# Altium PCB FMC_P_CAM.PcbDoc
Units mm, origin at the board's own origin, x right, y up, seen from the top; angles counter-clockwise.
Board outline 152.4 x 101.6 mm, 6 copper layers (Top Layer, Internal Plane 1, Mid-Layer 1, Mid-Layer 2, Internal Plane 2, Bottom Layer); 29 components, 109 nets, 390 pads, 133 vias.
Unrouted connection lines stored in the file: 5.
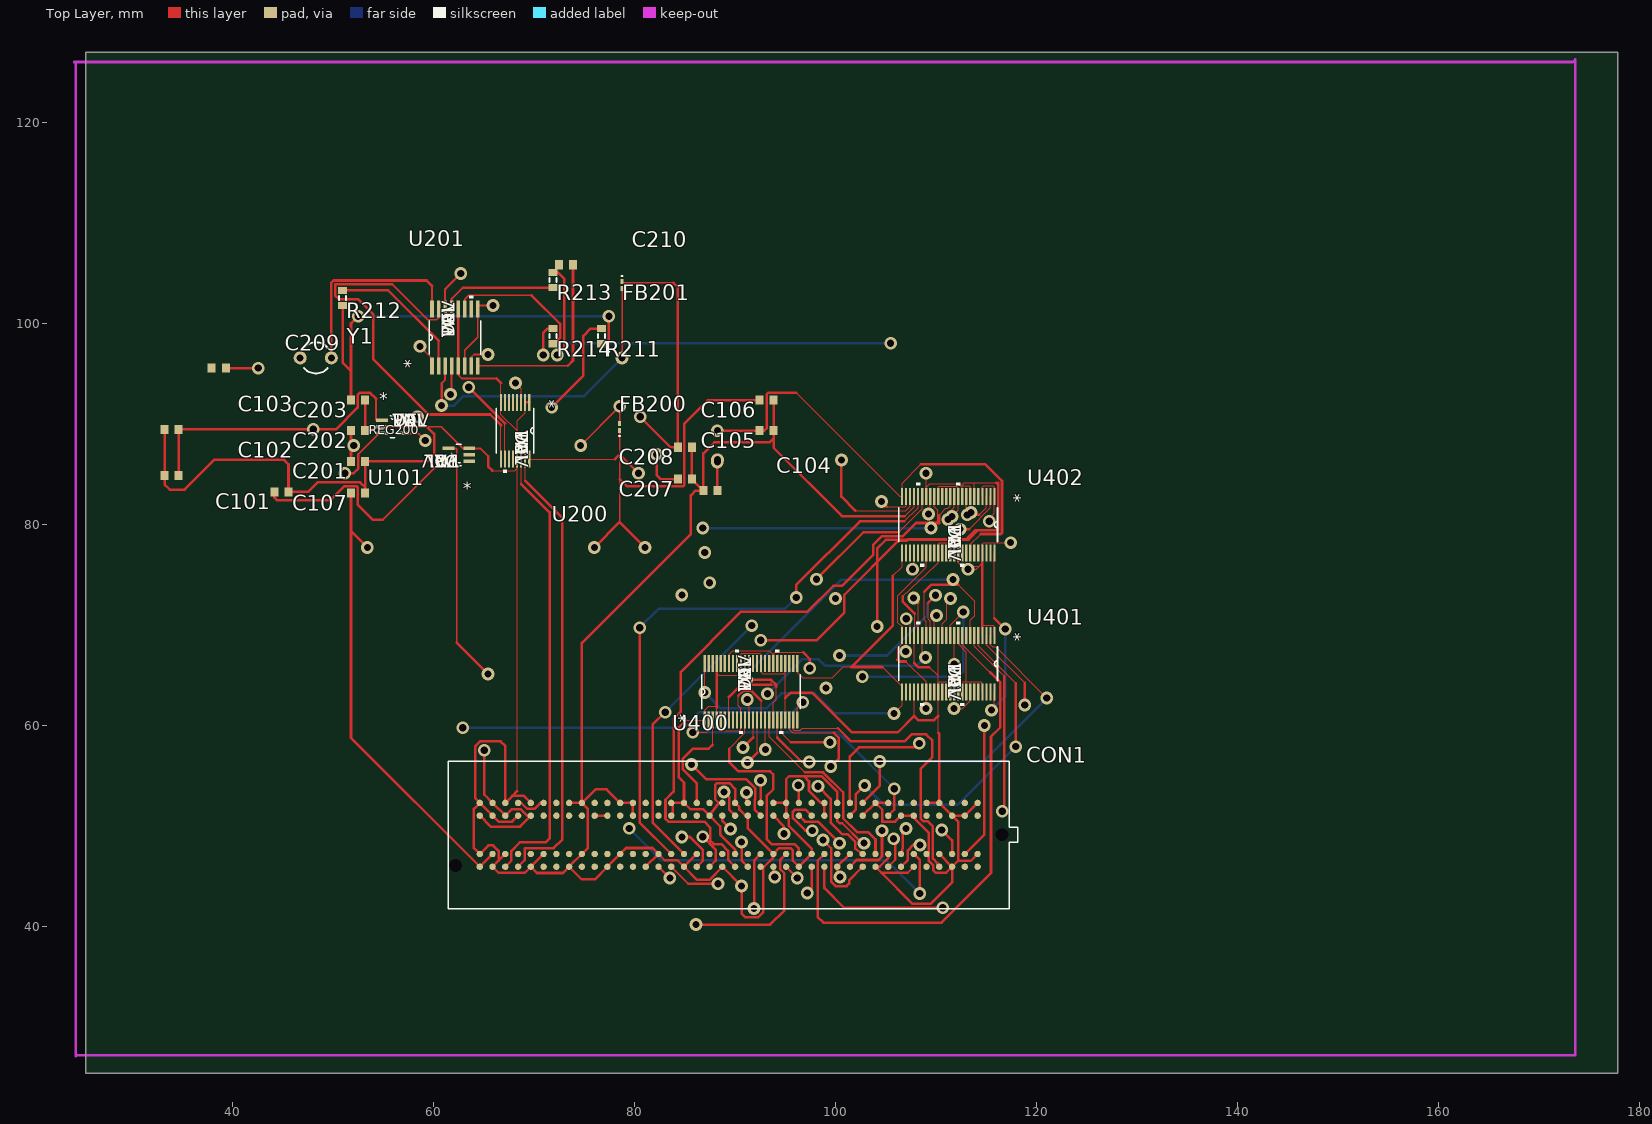
[diagram p0: Top Layer view]
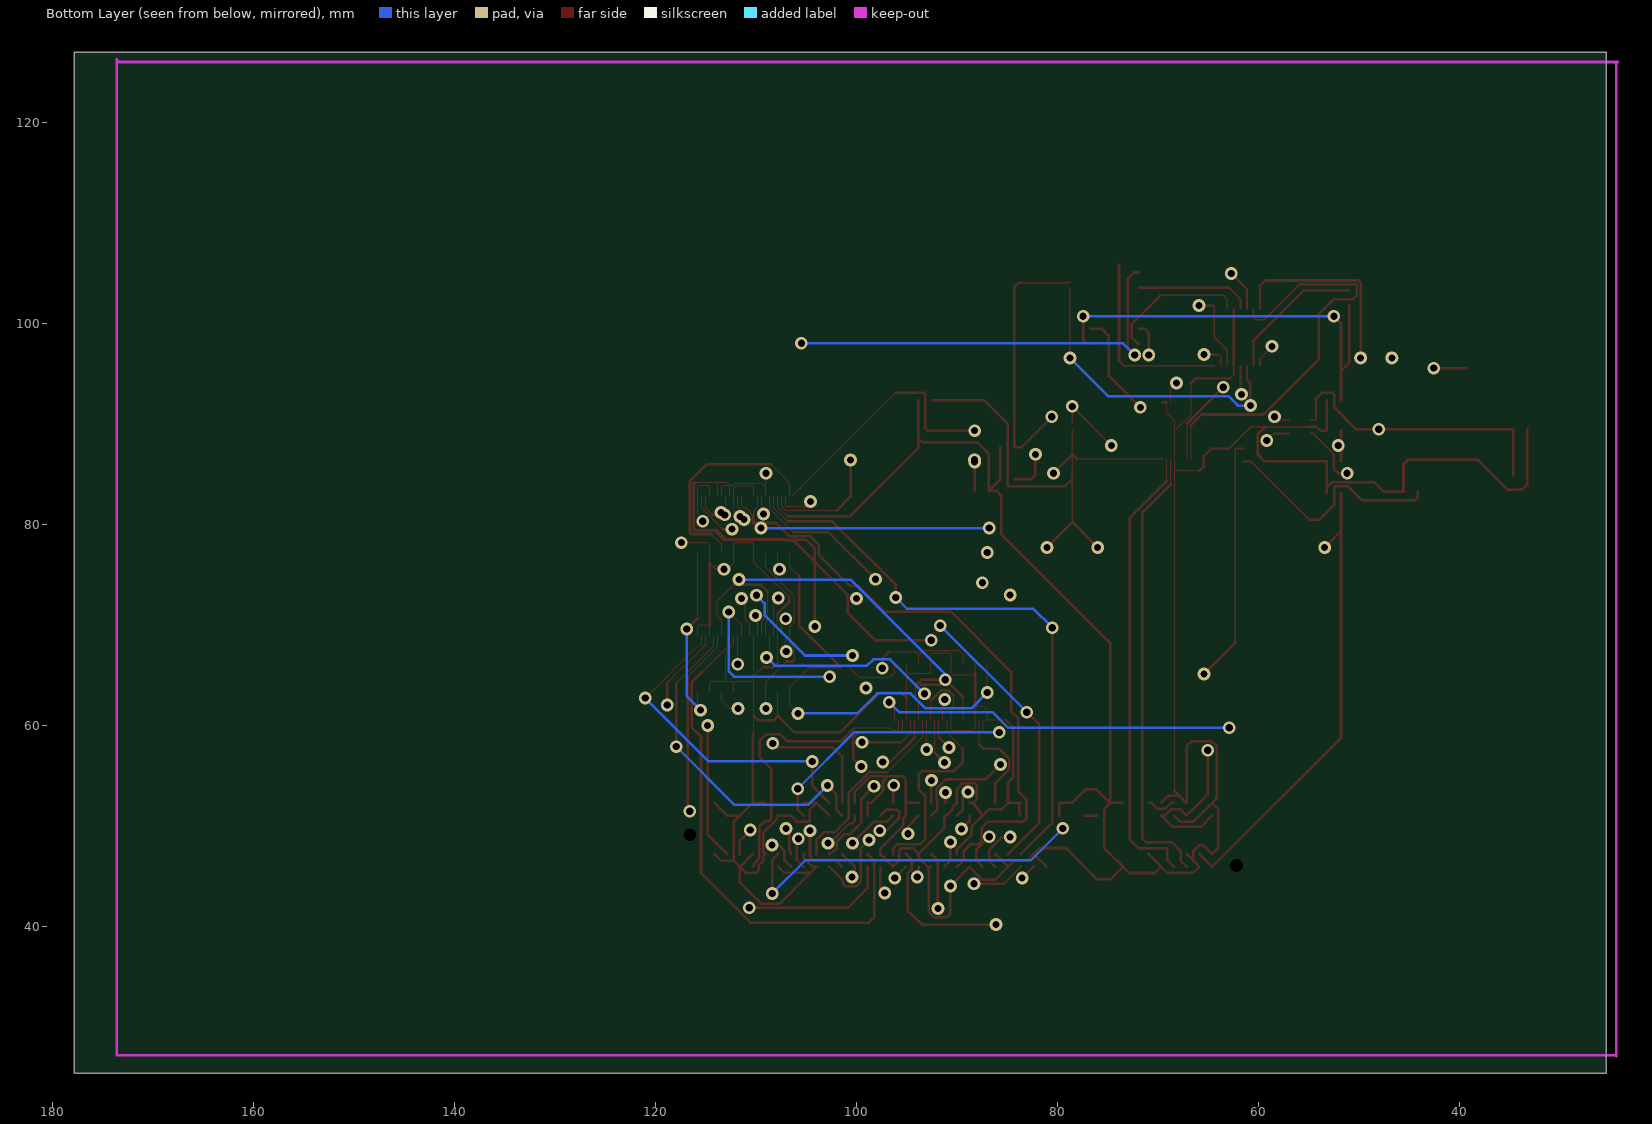
[diagram p1: Bottom Layer view, seen from below]
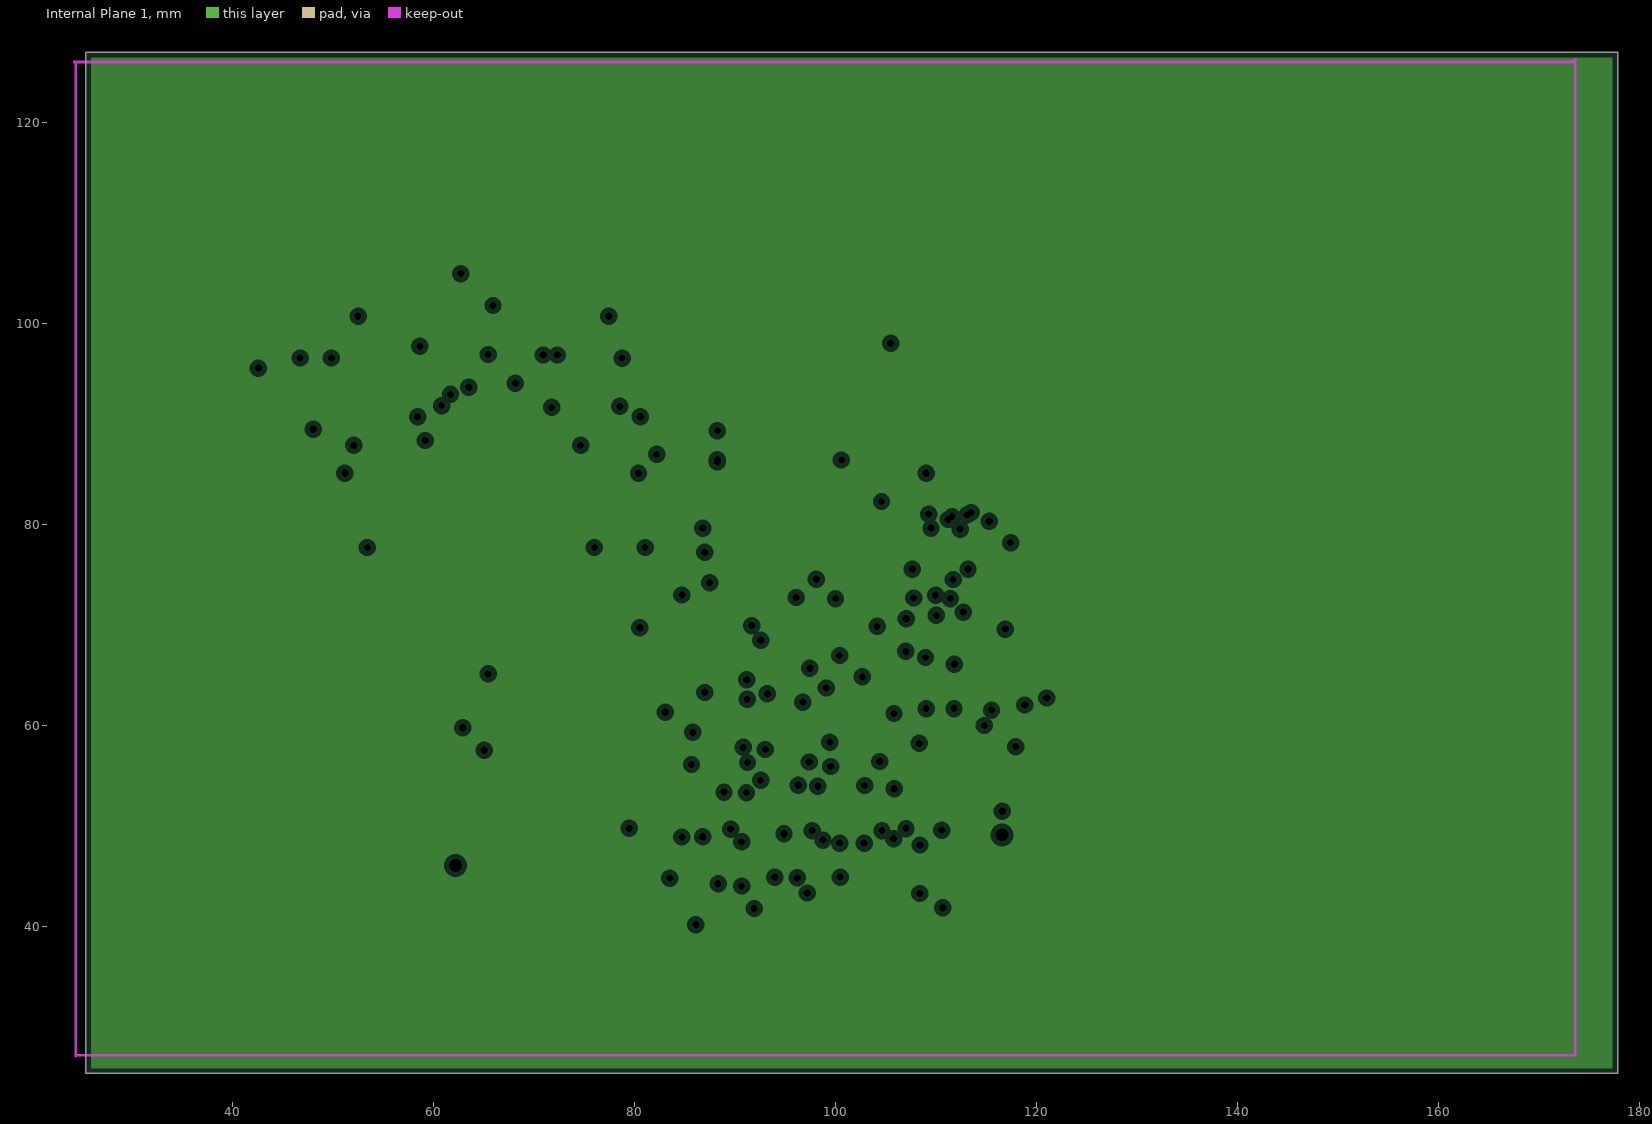
[diagram p2: Internal Plane 1, clearances drawn from the general rule]
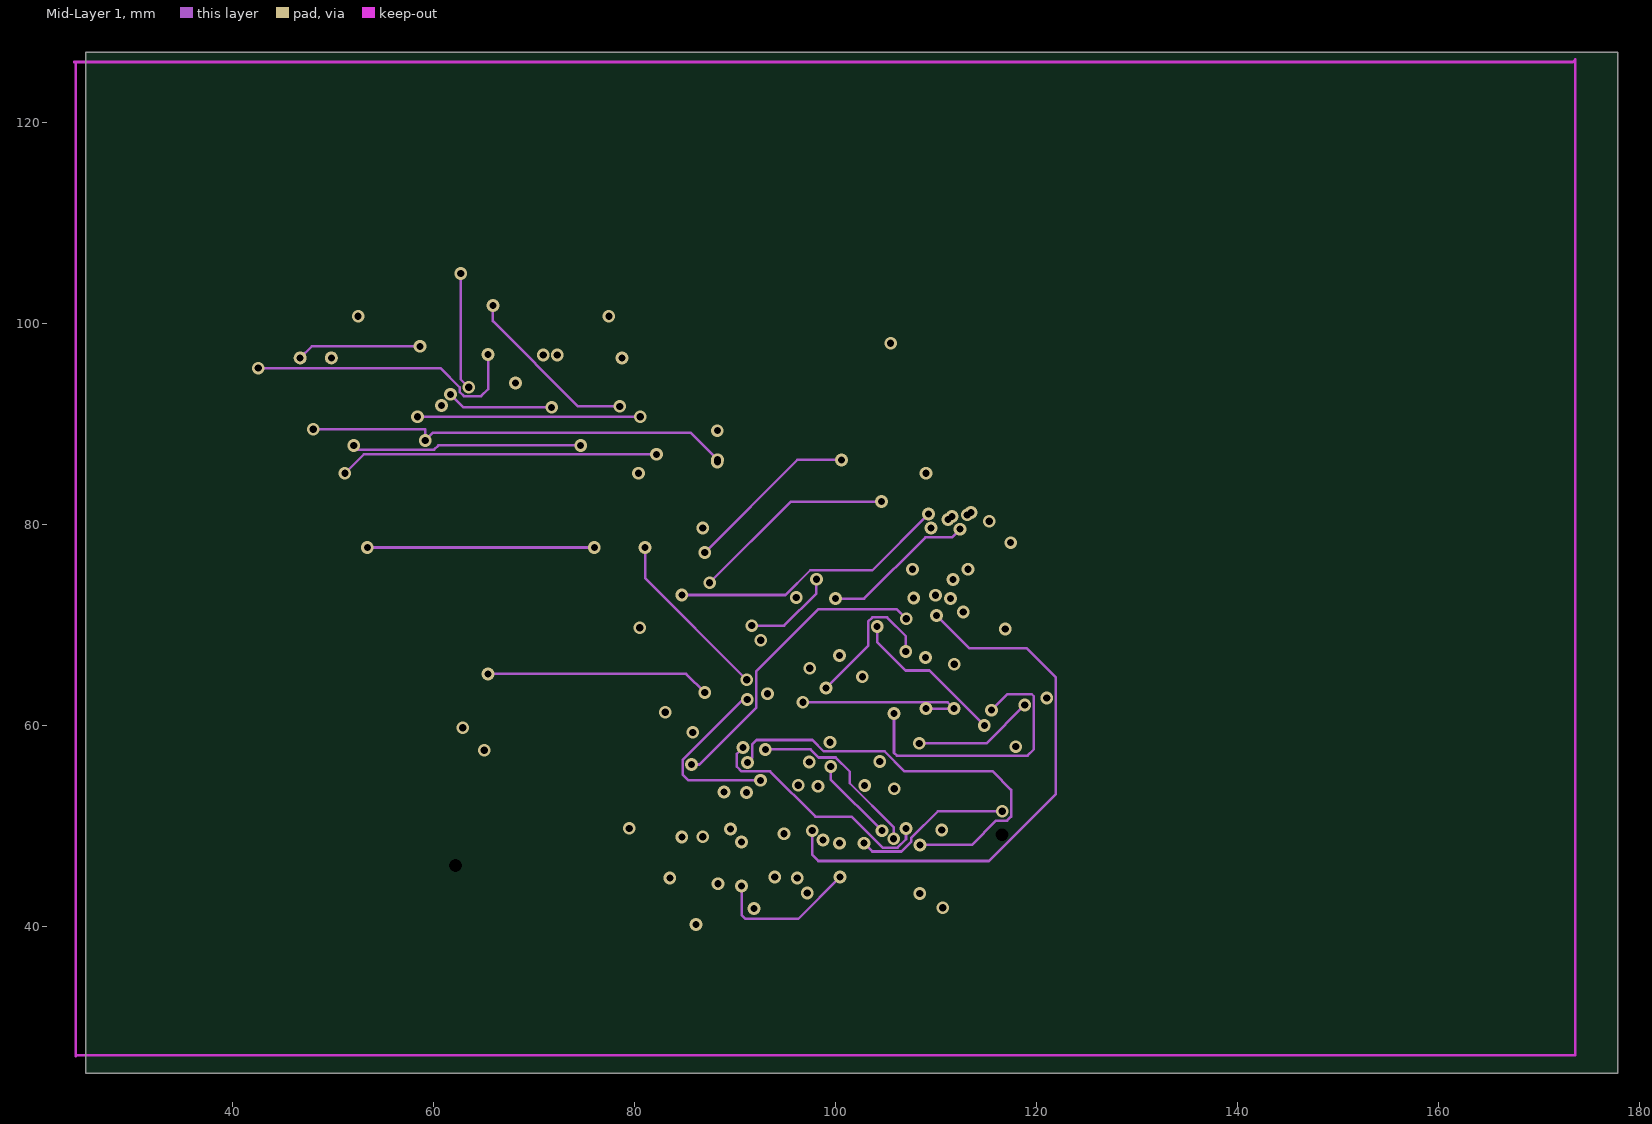
[diagram p3: Mid-Layer 1]
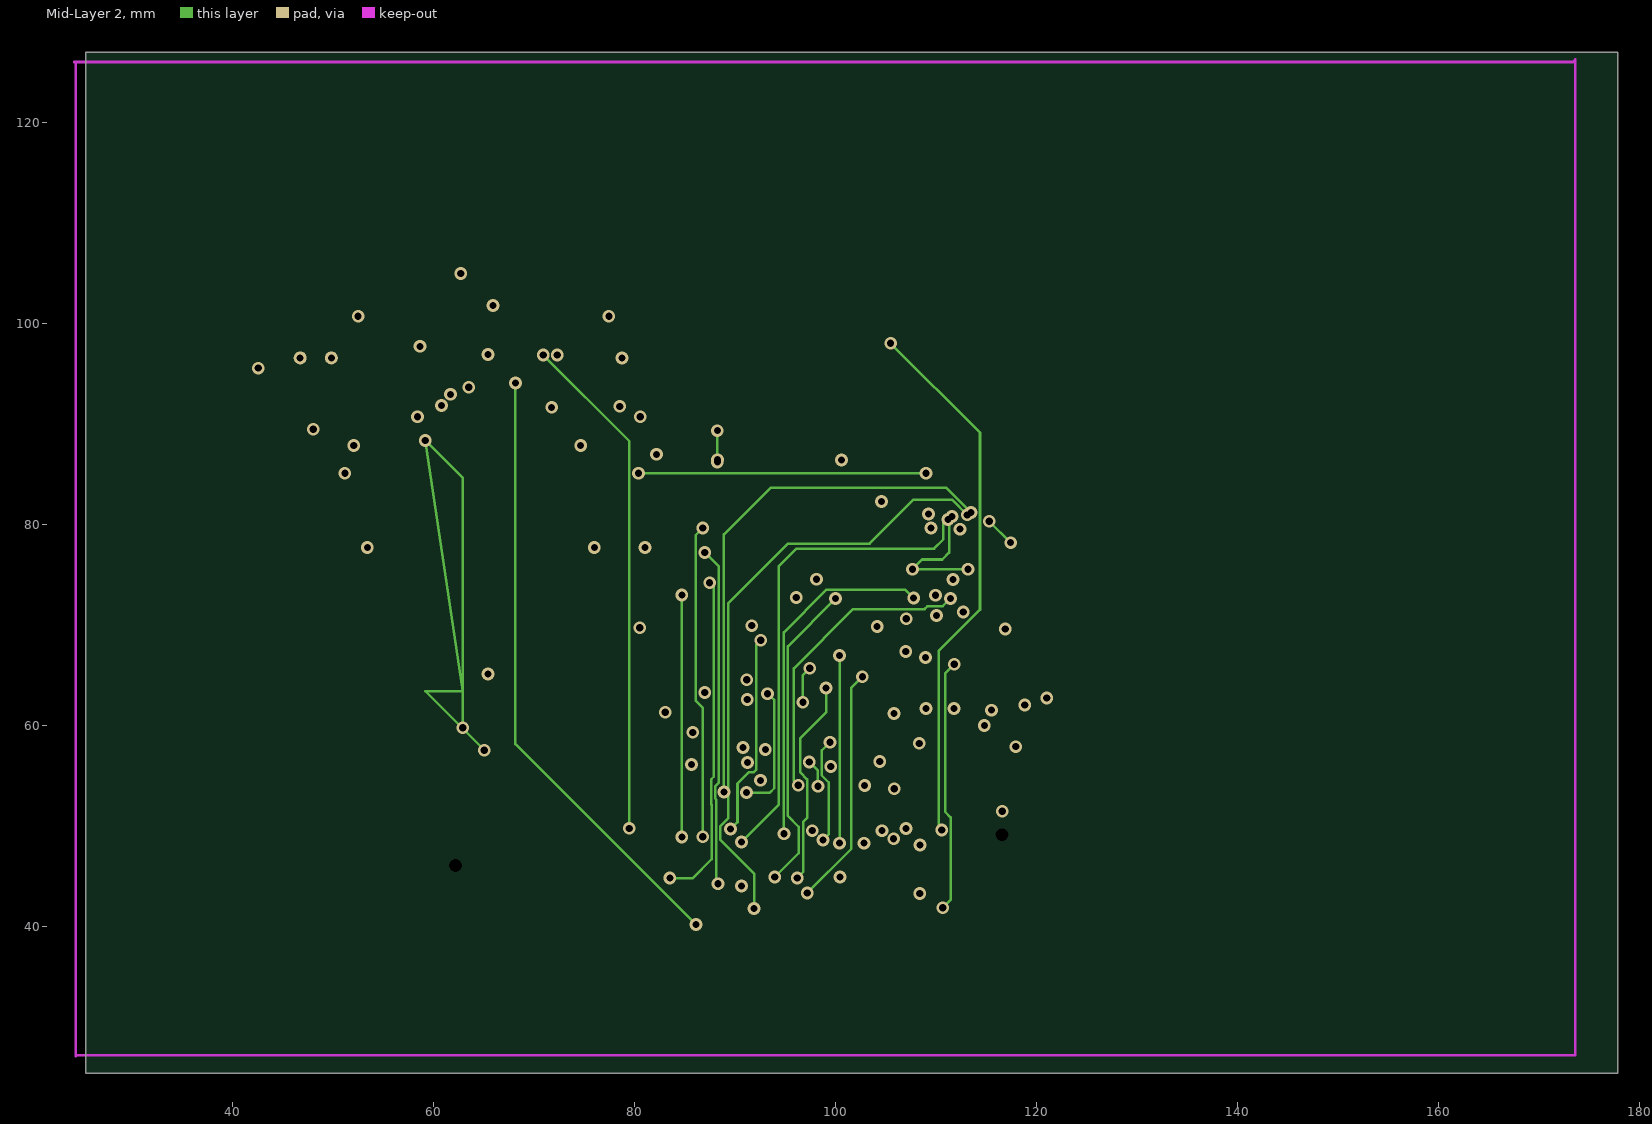
[diagram p4: Mid-Layer 2]
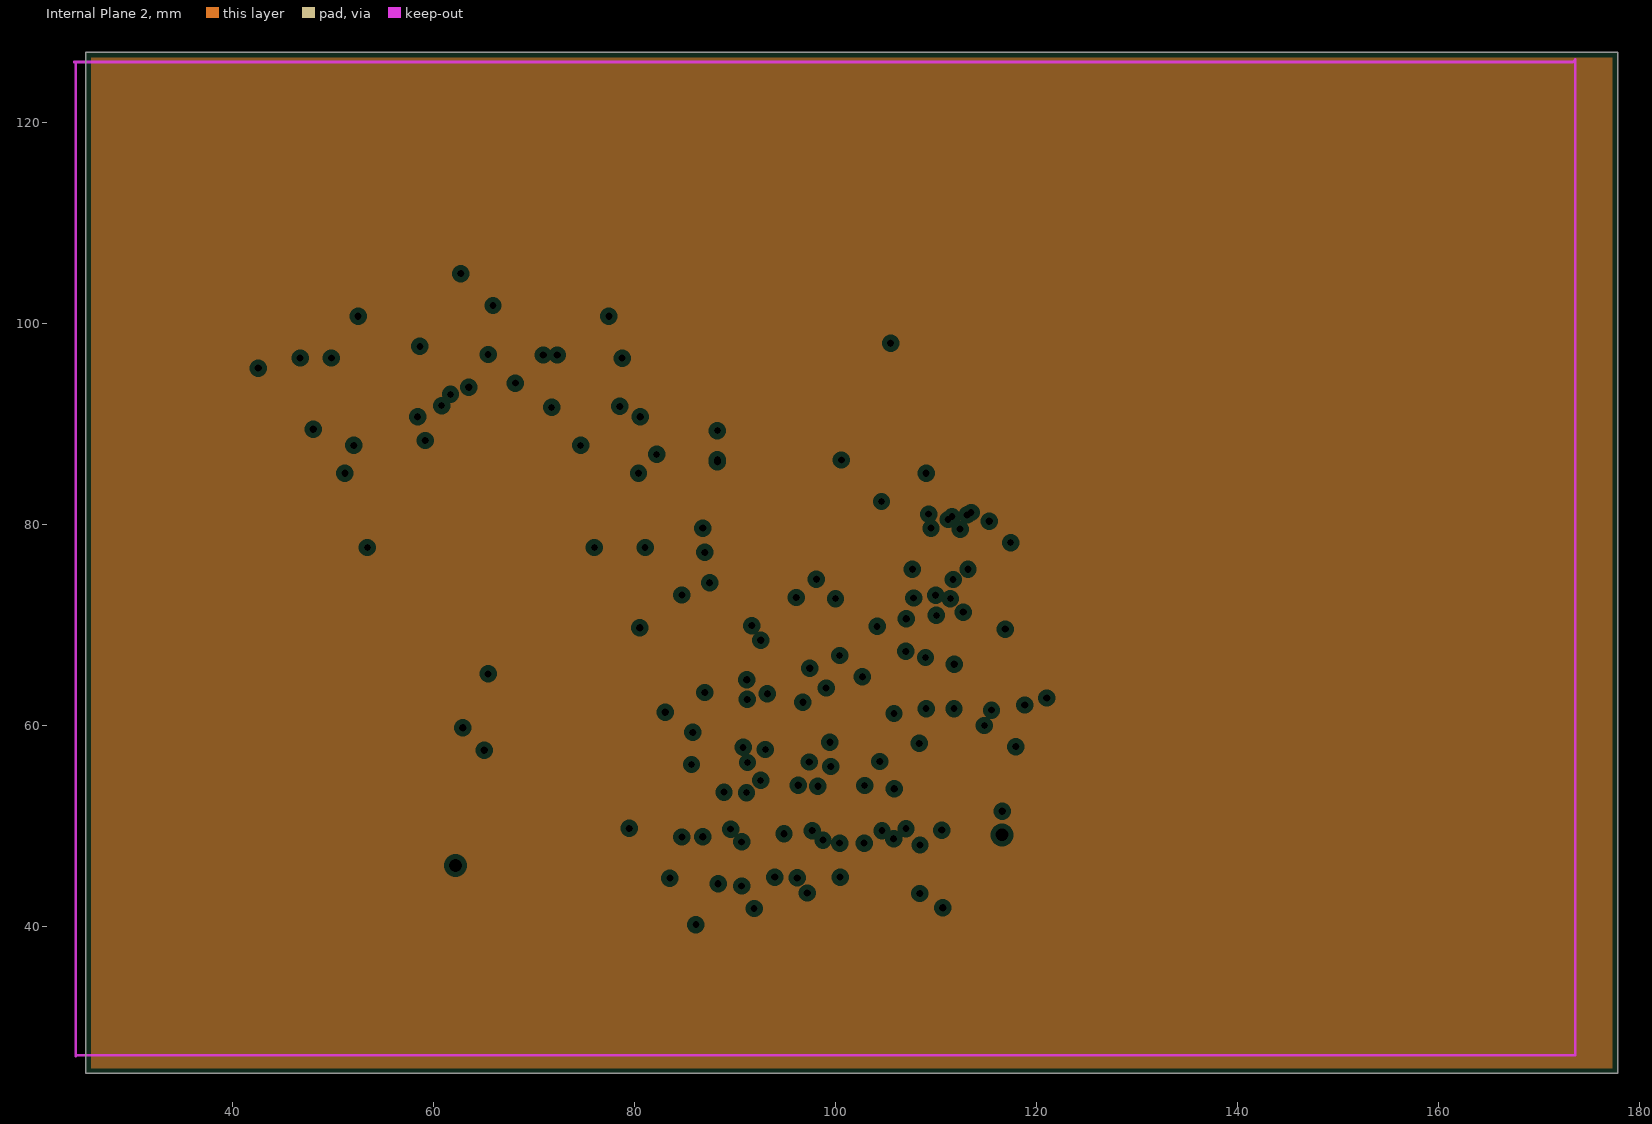
[diagram p5: Internal Plane 2, clearances drawn from the general rule]

## Layer stack, top to bottom
Top Layer: signal copper 0.0356
Dielectric: core 0.32, FR-4, Dk 4.8
Internal Plane 1: plane copper 0.0356
Dielectric: prepreg 0.32, FR-4, Dk 4.8
Mid-Layer 1: signal copper 0.0356
Dielectric: core 0.32, FR-4, Dk 4.8
Mid-Layer 2: signal copper 0.0356
Dielectric: prepreg 0.32, FR-4, Dk 4.8
Internal Plane 2: plane copper 0.0356
Dielectric: core 0.32, FR-4, Dk 4.8
Bottom Layer: signal copper 0.0356

## Board outline
25.4,25.4 177.8,25.4 177.8,127 25.4,127

## Design rules (kind name [scope] priority, off if disabled: settings)
Clearance [All] p1: gap=0.127
ComponentOrientations [All] p1: allowedrotations=32
PermittedLayers [All] p1: toplayerpermitted=TRUE bottomlayerpermitted=TRUE
PlaneClearance [All] p1: clearance=0.508
PlaneConnect [All] p1: planeconnectstyle=Relief reliefexpansion=0.508 reliefentries=4 reliefconductorwidth=0.254 reliefairgap=0.254
PolygonConnect [All] p1: connectstyle=Relief reliefconductorwidth=0.254 reliefentries=4 polygonreliefangle="90 Angle"
RoomDefinition camera_interface [InComponentClass('camera_interface')] p1: confinementstyle=ConfineIn formatcopy=TRUE lockcomponents=FALSE outline 25.146,24.892 177.038,24.892 177.038,127 25.146,127
RoomDefinition fmc_interface [InComponentClass('fmc_interface')] p2: confinementstyle=ConfineIn formatcopy=TRUE lockcomponents=FALSE outline 24.892,25.019 176.784,25.019 176.784,126.746 24.892,126.746
RoomDefinition i2c_video_clock [InComponentClass('i2c_video_clock')] p3: confinementstyle=ConfineIn formatcopy=TRUE lockcomponents=FALSE outline 23.089,25.83 175.108,25.83 175.108,127.176 23.089,127.176
RoutingVias [All] p1: holewidth=0.711 width=1.27 viastyle="Through Hole" minholewidth=0.711 minwidth=1.27 maxholewidth=0.711 maxwidth=1.27
SMDNeckDown [All] p1: percent=50.000
SMDToCorner [All] p1: distance=0
SMDToPlane [All] p1: distance=0
SilkscreenOverComponentPads [All] p1: minsilkscreentomaskgap=0.254
SolderMaskExpansion [All] p1: expansion=0.102
Width [All] p1: maxlimit=0.254 minlimit=0.051 preferedwidth=0.254
25 further rules are at their usual default settings.

## Classes and differential pairs
net class FMC_DVO_D[11..0]: FMC_DVO_0 FMC_DVO_1 FMC_DVO_2 FMC_DVO_3 FMC_DVO_4 FMC_DVO_5 FMC_DVO_6 FMC_DVO_7 FMC_DVO_8 FMC_DVO_9 FMC_DVO_10 FMC_DVO_11 FMC_DVO_D0 FMC_DVO_D1 FMC_DVO_D2 FMC_DVO_D3 FMC_DVO_D4 FMC_DVO_D5 FMC_DVO_D6 FMC_DVO_D7 FMC_DVO_D8 FMC_DVO_D9 FMC_DVO_D10 FMC_DVO_D11
net class FMC_CAM2_RSVD[6..0]: FMC_CAM2_RSVD0 FMC_CAM2_RSVD1 FMC_CAM2_RSVD2 FMC_CAM2_RSVD3 FMC_CAM2_RSVD4 FMC_CAM2_RSVD5 FMC_CAM2_RSVD6
net class FMC_CAM2_D[9..0]: FMC_CAM2_D0 FMC_CAM2_D1 FMC_CAM2_D2 FMC_CAM2_D3 FMC_CAM2_D4 FMC_CAM2_D5 FMC_CAM2_D6 FMC_CAM2_D7 FMC_CAM2_D8 FMC_CAM2_D9
net class FMC_CAM1_D[9..0]: FMC_CAM1_D0 FMC_CAM1_D1 FMC_CAM1_D2 FMC_CAM1_D3 FMC_CAM1_D4 FMC_CAM1_D5 FMC_CAM1_D6 FMC_CAM1_D7 FMC_CAM1_D8 FMC_CAM1_D9
net class FMC_CAM1_RSVD[6..0]: FMC_CAM1_RSVD0 FMC_CAM1_RSVD1 FMC_CAM1_RSVD2 FMC_CAM1_RSVD3 FMC_CAM1_RSVD4 FMC_CAM1_RSVD5 FMC_CAM1_RSVD6
component class i2c_video_clock: C201 C202 C203 C207 C208 C209 C210 FB200 FB201 R211 R212 R213 R214 REG200 U200 U201 Y1
component class fmc_interface: C101 C102 C103 C104 C105 C106 C107 CON1 U101
component class camera_interface: U400 U401 U402

## Components (designator, comment, footprint, x,y, rotation, side; value= is the part's Value field where it differs from the comment)
C101 "Cap" 1608[0603] 44.847,83.255 r180 top
C102 "Cap" 1608[0603] 33.925,84.906 r0 top
C103 "Cap" 1608[0603] 33.925,89.478 r0 top
C104 "Cap" 1608[0603] 87.519,83.382 r0 top
C105 "Cap" 1608[0603] 93.107,89.351 r180 top
C106 "Cap" 1608[0603] 93.107,92.399 r180 top
C107 "Cap" 1608[0603] 52.467,83.128 r180 top
C201 "Cap" 1608[0603] 52.467,86.303 r180 top
C202 "Cap" 1608[0603] 52.467,89.351 r180 top
C203 "Cap" 1608[0603] 52.467,92.399 r180 top
C207 "Cap" 1608[0603] 84.979,84.525 r180 top
C208 "Cap" 1608[0603] 84.979,87.7 r180 top
C209 "Cap" 1608[0603] 38.608,95.572 r0 top
C210 "Cap" 1608[0603] 73.152,105.859 r0 top
CON1 "MC-LPC-10" ASP-134604-01 89.344,49.137 r0 top
FB200 "Inductor" 0603 78.502,89.732 r90 top
FB201 "Inductor" 0603 78.74,103.827 r270 top
R211 "Res3" J1-0603 76.708,98.747 r270 top
R212 "Res3" J1-0603 50.927,102.557 r270 top
R213 "Res3" J1-0603 71.882,104.335 r270 top
R214 "Res3" J1-0603 71.882,98.747 r270 top
REG200 "TPS71718_DCK_5" DCK5 55.896,89.732 r0 top
U101 "SN74LVC1G14_DCK_" DCK5 62.5,86.938 r180 top
U200 "PCA9546A_DGV_16" DGV16 68.088,89.351 r270 top
U201 "CDCE925_PW_16" PW16 62.103,98.62 r90 top
U400 "SN74AVCH16T245_D" DGV48 91.567,63.373 r90 top
U401 "SN74AVCH16T245_D" DGV48 111.188,66.155 r270 top
U402 "SN74AVCH16T245_D" DGV48 111.188,79.998 r270 top
Y1 "XTAL" R38 48.26,96.588 r90 top

## Footprints (in the part's own frame and the unit in brackets; to place one, negate y for a bottom-side part, rotate by r counter-clockwise, add the part's x,y. Pads: shape width x height; smd on the part's side, far side on the other; paste and mask are expansions set on the pad)
0603 [mm] "Chip Inductor, Body 0.6x0.3mm, IPC High Density"
  rect 0.5x0.3 smd: 1(-0.35,0) 2(0.35,0)
  silkscreen extent -0.9,-0.05 -0.9,0.05, body extent -0.33,-0.18 0.33,0.18, height 0.55
1608[0603] [mm] "Chip Capacitor, Body 1.6x0.8mm, IPC High Density"
  rect 0.8x0.9 smd: 1(-0.7,0) 2(0.7,0)
  body extent -0.87,-0.48 0.87,0.48, height 1.3
ASP-134604-01 [mm] "Samtec ASP-134604-01, LPC used for FMC, Terminal (Module Side) 10mm stack height"
  round 0.7 hole 1.27 unplated: 0(-27.19,-3.05) 0(27.19,0)
  round 0.64 smd: C1(24.765,3.175) C2(23.495,3.175) C3(22.225,3.175) C4(20.955,3.175) C5(19.685,3.175) C6(18.415,3.175) C7(17.145,3.175) C8(15.875,3.175) C9(14.605,3.175) C10(13.335,3.175) C11(12.065,3.175) C12(10.795,3.175) C13(9.525,3.175) C14(8.255,3.175) C15(6.985,3.175) C16(5.715,3.175) C17(4.445,3.175) C18(3.175,3.175) C19(1.905,3.175) C20(0.635,3.175) C21(-0.635,3.175) C22(-1.905,3.175) C23(-3.175,3.175) C24(-4.445,3.175) C25(-5.715,3.175) C26(-6.985,3.175) C27(-8.255,3.175) C28(-9.525,3.175) C29(-10.795,3.175) C30(-12.065,3.175) C31(-13.335,3.175) C32(-14.605,3.175) C33(-15.875,3.175) C34(-17.145,3.175) C35(-18.415,3.175) C36(-19.685,3.175) C37(-20.955,3.175) C38(-22.225,3.175) C39(-23.495,3.175) C40(-24.765,3.175) D1(24.765,1.905) D2(23.495,1.905) D3(22.225,1.905) D4(20.955,1.905) D5(19.685,1.905) D6(18.415,1.905) D7(17.145,1.905) D8(15.875,1.905) D9(14.605,1.905) D10(13.335,1.905) D11(12.065,1.905) D12(10.795,1.905) D13(9.525,1.905) D14(8.255,1.905) D15(6.985,1.905) D16(5.715,1.905) D17(4.445,1.905) D18(3.175,1.905) D19(1.905,1.905) D20(0.635,1.905) D21(-0.635,1.905) D22(-1.905,1.905) D23(-3.175,1.905) D24(-4.445,1.905) D25(-5.715,1.905) D26(-6.985,1.905) D27(-8.255,1.905) D28(-9.525,1.905) D29(-10.795,1.905) D30(-12.065,1.905) D31(-13.335,1.905) D32(-14.605,1.905) D33(-15.875,1.905) D34(-17.145,1.905) D35(-18.415,1.905) D36(-19.685,1.905) D37(-20.955,1.905) D38(-22.225,1.905) D39(-23.495,1.905) D40(-24.765,1.905) G1(24.765,-1.905) G2(23.495,-1.905) G3(22.225,-1.905) G4(20.955,-1.905) G5(19.685,-1.905) G6(18.415,-1.905) G7(17.145,-1.905) G8(15.875,-1.905) G9(14.605,-1.905) G10(13.335,-1.905) G11(12.065,-1.905) G12(10.795,-1.905) G13(9.525,-1.905) G14(8.255,-1.905) G15(6.985,-1.905) G16(5.715,-1.905) G17(4.445,-1.905) G18(3.175,-1.905) G19(1.905,-1.905) G20(0.635,-1.905) G21(-0.635,-1.905) G22(-1.905,-1.905) G23(-3.175,-1.905) G24(-4.445,-1.905) G25(-5.715,-1.905) G26(-6.985,-1.905) G27(-8.255,-1.905) G28(-9.525,-1.905) G29(-10.795,-1.905) G30(-12.065,-1.905) G31(-13.335,-1.905) G32(-14.605,-1.905) G33(-15.875,-1.905) G34(-17.145,-1.905) G35(-18.415,-1.905) G36(-19.685,-1.905) G37(-20.955,-1.905) G38(-22.225,-1.905) G39(-23.495,-1.905) G40(-24.765,-1.905) H1(24.765,-3.175) H2(23.495,-3.175) H3(22.225,-3.175) H4(20.955,-3.175) H5(19.685,-3.175) H6(18.415,-3.175) H7(17.145,-3.175) H8(15.875,-3.175) H9(14.605,-3.175) H10(13.335,-3.175) H11(12.065,-3.175) H12(10.795,-3.175) H13(9.525,-3.175) H14(8.255,-3.175) H15(6.985,-3.175) H16(5.715,-3.175) H17(4.445,-3.175) H18(3.175,-3.175) H19(1.905,-3.175) H20(0.635,-3.175) H21(-0.635,-3.175) H22(-1.905,-3.175) H23(-3.175,-3.175) H24(-4.445,-3.175) H25(-5.715,-3.175) H26(-6.985,-3.175) H27(-8.255,-3.175) H28(-9.525,-3.175) H29(-10.795,-3.175) H30(-12.065,-3.175) H31(-13.335,-3.175) H32(-14.605,-3.175) H33(-15.875,-3.175) H34(-17.145,-3.175) H35(-18.415,-3.175) H36(-19.685,-3.175) H37(-20.955,-3.175) H38(-22.225,-3.175) H39(-23.495,-3.175) H40(-24.765,-3.175)
  silkscreen extent -27.89,-7.34 28.78,7.34, body extent -27.89,-7.34 28.78,7.34, height 6.1
DCK5 [mil]
  rect 46x14 smd: 1(-41,25.59) 2(-41,0) 3(-41,-25.59) 4(41,-25.59) 5(41,25.59)
  silkscreen extent -9,-42 27,42
DGV16 [mil]
  rect 66x9 smd: 1(-111,55.12) 2(-111,39.37) 3(-111,23.62) 4(-111,7.87) 5(-111,-7.87) 6(-111,-23.62) 7(-111,-39.37) 8(-111,-55.12) 9(111,-55.12) 10(111,-39.37) 11(111,-23.62) 12(111,-7.87) 13(111,7.87) 14(111,23.62) 15(111,39.37) 16(111,55.12)
  silkscreen extent -89,-73 164,73
DGV48 [mil]
  rect 66x9 smd: 1(-111,181.1) 2(-111,165.35) 3(-111,149.61) 4(-111,133.86) 5(-111,118.11) 6(-111,102.36) 7(-111,86.61) 8(-111,70.87) 9(-111,55.12) 10(-111,39.37) 11(-111,23.62) 12(-111,7.87) 13(-111,-7.87) 14(-111,-23.62) 15(-111,-39.37) 16(-111,-55.12) 17(-111,-70.87) 18(-111,-86.61) 19(-111,-102.36) 20(-111,-118.11) 21(-111,-133.86) 22(-111,-149.61) 23(-111,-165.35) 24(-111,-181.1) 25(111,-181.1) 26(111,-165.35) 27(111,-149.61) 28(111,-133.86) 29(111,-118.11) 30(111,-102.36) 31(111,-86.61) 32(111,-70.87) 33(111,-55.12) 34(111,-39.37) 35(111,-23.62) 36(111,-7.87) 37(111,7.87) 38(111,23.62) 39(111,39.37) 40(111,55.12) 41(111,70.87) 42(111,86.61) 43(111,102.36) 44(111,118.11) 45(111,133.86) 46(111,149.61) 47(111,165.35) 48(111,181.1)
  silkscreen extent -164,-193 164,193
J1-0603 [mm] "Chip Resistor, Body 1.6x0.8mm, IPC High Density"
  rect 0.7x0.9 smd: 1(-0.75,0) 2(0.75,0)
  silkscreen extent -0.2,-0.35 0.2,0.35, body extent -0.85,-0.48 0.85,0.48, height 0.9
PW16 [mil]
  rect 66x14 smd: 1(-111,89.57) 2(-111,63.98) 3(-111,38.39) 4(-111,12.8) 5(-111,-12.8) 6(-111,-38.39) 7(-111,-63.98) 8(-111,-89.57) 9(111,-89.57) 10(111,-63.98) 11(111,-38.39) 12(111,-12.8) 13(111,12.79) 14(111,38.39) 15(111,63.98) 16(111,89.57)
  silkscreen extent -66,-100 164,100
R38 [mm] "Crystal, Thru-Hole; 2 Leads; Body 3.1 x 8.2 mm (Dia.xH)"
  round 1.3 hole 0.7: 1(0,1.55) 2(0,-1.55)
  silkscreen extent -1.55,-1.19 1.55,1.17

## Part data
C101 C102 C103 C104 C105 C106 C107 C201 C202 C203 C207 C208 C209 C210: library part "Cap Semi", "Capacitor (Semiconductor SIM Model)"
CON1: library part CONNECTOR_VITA57_LPC, "Connector VITA57 LPC"
R211 R212 R213 R214: "Resistor"
REG200 U101 U200 U201 U400 U401 U402: "Imported"
Y1: "Crystal Oscillator"

## Via types
v1: diameter 1.27, hole 0.711, Top Layer to Bottom Layer, 133 vias

## Nets (pads, with @x,y where several pads share a name; then routed paths per layer and width w, separated by ;. In a path a pad name is that pad's centre, name@x,y a point inside that pad or via, vN(x,y) a via of type N, cw(c..) or ccw(c..) an arc to the next point about the centre after c; other vN are vias at no path point)
3P3AUX: C101.2 U101.5 | length 23.4
  Top Layer w0.178: 54.911,80.467 60.731,86.288 U101.5
  Top Layer w0.254: C101.2 44.147,82.702 44.401,82.448 49.721,82.448 51.105,83.832 52.324,83.832 52.426,83.73 52.426,81.987 53.946,80.467 54.911,80.467
3P3V: C102.2 C103.2 C104.2 C105.2 CON1.C39 CON1.D36 CON1.D38 CON1.D40 REG200.1 REG200.4 U400.24 U400.31 U400.42 U401.24 U401.31 U401.42 U402.24 U402.31 U402.42 | length 304.7
  Top Layer w0.114: U400.42 89.367,67.056 89.767,67.456 93.367,67.456 93.767,67.056 ; U400.31 93.767,67.056 ; 96.088,93.116 106.387,82.817 U402.24 106.588,84.125 108.468,86.004 ; U400.24 96.167,61.775 v1(96.723,62.332) ; 96.774,67.285 93.996,67.285 93.767,67.056 ; 106.14,66.567 106.14,67.757 106.588,68.205 U401.24 106.588,69.825 106.172,70.241 106.172,72.929 108.988,75.745 U402.31 ; 106.969,66.383 108.988,64.364 U401.31 v1(108.988,61.697) ; v1(111.76,61.697) 112.598,61.697 113.388,62.487 U401.42 ; U402.42 113.388,78.029 114.428,79.069
  Top Layer w0.178: 54.254,92.532 54.254,90.382 REG200.1 ; REG200.4 58.441,89.082 v1(59.157,88.367)
  Top Layer w0.254: C102.2 C103.2 v1@48,89.478 ; v1(48.006,89.484) v1@48,89.478 ; 54.254,92.532 53.67,93.116 52.629,93.116 52.426,92.913 52.426,91.637 50.267,89.478 v1@48,89.478 ; CON1.D40 65.659,49.962 68.579,49.962 CON1.D36 69.291,51.042 68.644,51.689 67.767,51.689 CON1.D38 CON1.C39 65.024,53.137 v1(65.024,57.556) ; v1(88.214,86.233) v1@88.219,86.228 ; v1(88.214,89.351) C105.2 92.881,89.351 93.142,89.611 93.142,92.989 93.269,93.116 96.088,93.116 ; C104.2 v1@88.219,86.228 ; v1(88.219,86.462) v1@88.219,86.228 ; 96.774,67.285 97.409,66.65 v1(97.409,65.71) ; 106.14,66.567 106.325,66.383 106.969,66.383 ; 108.468,86.004 114.892,86.004 116.538,84.359 116.538,79.173 116.434,79.069 114.428,79.069
  Mid-Layer 1 w0.254: v1(48.006,89.484) 59.157,89.484 v1(59.157,88.367) 59.944,89.154 85.527,89.154 v1(88.219,86.462) ; v1(96.723,62.332) 111.125,62.332 v1(111.76,61.697) v1(108.988,61.697)
  Mid-Layer 2 w0.254: v1(62.89,59.792) 62.89,63.424 ; v1(65.024,57.556) 59.157,63.424 62.89,63.424 ; v1(88.214,86.233) v1(88.214,89.351) ; v1(96.723,62.332) 96.723,65.024 v1(97.409,65.71) ; 62.89,63.424 62.89,84.633 v1(59.157,88.367) 62.89,63.424
  Bottom Layer w0.254: v1(62.89,59.792) 84.887,59.792 86.436,61.341 95.733,61.341 v1(96.723,62.332)
3P33AUX: CON1.D32
12P0V: CON1.C35 CON1.C37 | length 3
  Top Layer w0.254: CON1.C37 68.707,52.312 69.304,51.714 70.002,51.714 70.6,52.312 CON1.C35
CAM1_SCL: U200.7
CAM1_SDA: U200.6
CAM1_XCLK: C210.1
CAM2_SCL: U200.5
CAM2_SDA: U200.4
CAM2_XCLK: C209.1
EN#: U101.4 U400.25 U400.48 U401.25 U401.48 U402.25 U402.48 | length 146.9
  Top Layer w0.114: v1(86.967,63.297) 86.967,63.906 U400.48 ; U400.25 96.167,65.301 96.723,64.745 99.644,64.745 100.736,65.837 101.549,65.837 ; 104.623,65.837 106.588,63.871 U401.25 106.588,62.011 v1(105.791,61.214) ; 105.689,74.905 106.588,75.804 U402.25 ; v1(115.494,61.544) 115.788,61.839 U401.48 ; 115.788,70.673 U402.48
  Top Layer w0.178: U101.4 62.179,87.588 62.281,87.486 62.281,68.275
  Top Layer w0.254: 62.281,68.275 v1(65.405,65.151) ; 104.623,65.837 101.549,65.837 105.689,69.977 105.689,74.905 ; 115.788,70.673 v1(116.854,69.608)
  Mid-Layer 1 w0.254: v1(65.405,65.151) 85.113,65.151 v1(86.967,63.297) ; v1(105.791,61.214) 105.791,57.302 106.083,57.01 119.075,57.01 119.697,57.633 119.697,62.928 119.482,63.144 117.094,63.144 v1(115.494,61.544)
  Bottom Layer w0.254: v1(86.967,63.297) 88.542,61.722 93.091,61.722 94.59,63.221 97.892,63.221 99.898,61.214 v1(105.791,61.214) ; v1(115.494,61.544) 116.854,62.904 v1(116.854,69.608)
FMC_CAM1_D0: CON1.D15 U401.17 | length 41
  Top Layer w0.114: 109.188,72.231 109.188,70.59 109.388,70.39 U401.17
  Top Layer w0.254: CON1.D15 96.927,50.444 98.247,50.444 v1(100.381,48.311) ; 109.188,72.231 v1(109.931,72.974)
  Mid-Layer 2 w0.254: v1(100.381,48.311) v1(100.381,66.98)
  Bottom Layer w0.254: v1(100.381,66.98) 105.105,66.98 109.118,70.993 109.118,72.161 v1(109.931,72.974)
FMC_CAM1_D1: CON1.D14 U401.16 | length 63.1
  Top Layer w0.114: U401.16 v1@109.788,70.748
  Top Layer w0.254: CON1.D14 97.003,51.638 95.961,51.638 95.733,51.41 95.733,50.8 96.977,49.555 v1(97.663,49.555) ; v1@109.788,70.748 v1(110.007,70.968)
  Mid-Layer 1 w0.254: v1(97.663,49.555) 97.663,47.142 98.273,46.533 115.24,46.533 121.895,53.188 121.895,64.795 118.974,67.716 113.259,67.716 v1(110.007,70.968)
FMC_CAM1_D2: CON1.C15 U401.14 | length 36
  Top Layer w0.114: U401.14 110.588,70.164 111.03,70.605 v1@111.03,72.273
  Top Layer w0.254: v1(96.266,54.077) 96.329,54.013 CON1.C15 ; v1@111.03,72.273 v1(111.401,72.644)
  Mid-Layer 2 w0.254: v1(96.266,54.077) 95.834,54.508 95.834,65.71 101.727,71.603 108.839,71.603 109.118,71.882 110.639,71.882 v1(111.401,72.644)
FMC_CAM1_D3: CON1.C14 U401.13
FMC_CAM1_D4: CON1.H14 U401.12 | length 45.6
  Top Layer w0.114: U401.12 111.388,70.012 v1(112.674,71.298)
  Top Layer w0.254: v1(97.155,43.358) 97.599,43.802 CON1.H14
  Mid-Layer 2 w0.254: v1(97.155,43.358) 101.549,47.752 101.549,63.779 v1(102.641,64.872)
  Bottom Layer w0.254: v1(102.641,64.872) 112.166,64.872 112.674,65.38 v1(112.674,71.298)
FMC_CAM1_D5: CON1.H13 U401.11 | length 42.7
  Top Layer w0.114: v1@111.788,66.119 U401.11
  Top Layer w0.254: CON1.H13 98.869,43.841 100.826,41.885 v1(110.642,41.885) ; v1(111.785,66.116) v1@111.788,66.119
  Mid-Layer 2 w0.254: v1(110.642,41.885) 111.43,42.672 111.43,50.876 110.871,51.435 110.871,65.202 v1(111.785,66.116)
FMC_CAM1_D6: CON1.G13 U401.9 | length 51.7
  Top Layer w0.114: U401.9 112.588,68.072 115.371,65.289
  Top Layer w0.254: CON1.G13 98.196,46.559 98.196,40.97 98.755,40.411 110.515,40.411 115.443,45.339 115.443,58.903 116.383,59.842 116.383,64.277 115.371,65.289
FMC_CAM1_D7: CON1.G12 U401.8
FMC_CAM1_D8: CON1.D12 U401.6 | length 38.9
  Top Layer w0.114: U401.6 113.788,67.894 116.764,64.919
  Top Layer w0.254: CON1.D12 100.139,50.534 100.381,50.293 100.643,50.293 102.625,48.311 v1(102.819,48.311) ; v1(116.561,51.486) 116.764,51.689 116.764,64.919
  Mid-Layer 1 w0.254: v1(102.819,48.311) 103.648,47.482 106.537,47.482 107.493,48.438 107.493,48.819 110.16,51.486 v1(116.561,51.486)
FMC_CAM1_D9: CON1.D11 U401.5 | length 34.5
  Top Layer w0.114: U401.5 114.188,67.945 117.907,64.226
  Top Layer w0.254: CON1.D11 102.006,51.639 102.006,53.188 v1(102.87,54.051) ; v1(117.907,57.912) 117.907,64.226
  Bottom Layer w0.254: v1(102.87,54.051) 104.8,52.121 112.116,52.121 v1(117.907,57.912)
FMC_CAM1_HREF: CON1.C11 U401.3 | length 32.6
  Top Layer w0.114: U401.3 114.988,68.07 118.796,64.262
  Top Layer w0.254: CON1.C11 101.409,56.934 102.311,57.836 107.899,57.836 v1(108.306,58.242) ; v1(118.796,62.052) 118.796,64.262
  Mid-Layer 1 w0.254: v1(108.306,58.242) 114.986,58.242 v1(118.796,62.052)
FMC_CAM1_PCLK: CON1.H4 U400.23 | length 30.1
  Top Layer w0.114: U400.23 95.767,59.573 95.809,59.531 96.469,59.531 96.679,59.741 100.203,59.741
  Top Layer w0.254: 100.203,59.741 101.473,58.471 106.883,58.471 107.544,59.131 108.991,59.131 109.601,58.522 109.601,56.871 108.433,55.702 108.433,50.747 108.712,50.468 109.171,50.468 109.652,49.987 109.652,46.779 110.13,46.3 110.13,46.131 CON1.H4
FMC_CAM1_PWDN: CON1.C23 U400.3 | length 11
  Top Layer w0.114: 87.767,58.115 U400.3
  Top Layer w0.254: CON1.C23 86.169,54.267 84.76,55.677 84.76,56.693 85.776,57.709 87.361,57.709 87.767,58.115
FMC_CAM1_RST: CON1.D8 U400.2 | length 28
  Top Layer w0.114: v1(85.776,59.334) 87.164,59.334 87.367,59.538 U400.2
  Top Layer w0.254: CON1.D8 105.816,51.638 v1(105.816,53.722)
  Bottom Layer w0.254: v1(85.776,59.334) 100.203,59.334 v1(105.816,53.722)
FMC_CAM1_RSVD0: CON1.H11 U400.22 | length 24.1
  Top Layer w0.114: U400.22 95.367,59.624 95.701,59.29 99.807,59.29
  Top Layer w0.254: v1(99.492,55.931) 100.305,56.744 100.305,58.792 99.807,59.29 ; CON1.H11 102.082,46.634 104.242,46.634 104.597,46.99 v1(104.597,49.555)
  Mid-Layer 1 w0.254: v1(99.492,55.931) 99.492,54.661 v1(104.597,49.555)
FMC_CAM1_RSVD1: CON1.H10 U400.20 | length 25.8
  Top Layer w0.114: U400.20 94.567,59.306 95.529,58.344
  Top Layer w0.254: 95.529,58.344 v1(99.416,58.344) ; v1(98.73,48.616) 99.543,47.803 99.543,44.473 99.974,44.041 101.064,44.041 101.321,44.298 101.321,44.603 CON1.H10
  Mid-Layer 2 w0.254: v1(98.73,48.616) 99.289,49.174 99.289,54.369 98.603,55.055 98.603,57.531 v1(99.416,58.344)
FMC_CAM1_RSVD2: CON1.G10 U400.19 | length 17.7
  Top Layer w0.114: 94.167,58.833 U400.19
  Top Layer w0.254: 94.167,58.833 96.612,56.388 v1(97.358,56.388) ; v1(98.222,53.975) 99.492,52.705 99.492,50.343 100.66,49.174 101.212,49.174 101.93,48.456 101.93,47.752 CON1.G10
  Mid-Layer 2 w0.254: v1(97.358,56.388) 98.222,55.524 v1(98.222,53.975)
FMC_CAM1_RSVD3: CON1.G9 U400.17 | length 19.4
  Top Layer w0.114: U400.17 93.367,58.893 96.898,55.362
  Top Layer w0.254: 96.898,55.362 98.748,55.362 100.736,53.374 100.736,50.787 102.121,49.403 103.226,49.403 103.949,48.679 CON1.G9
FMC_CAM1_RSVD4: CON1.H8 U400.16 | length 23.9
  Top Layer w0.114: v1@92.967,57.655 U400.16
  Top Layer w0.254: v1@92.967,57.655 v1(92.989,57.633) ; CON1.H8 105.915,46.658 105.915,48.593 v1(105.757,48.752)
  Mid-Layer 1 w0.254: v1(92.989,57.633) 97.485,57.633 98.285,56.833 99.974,56.833 101.387,55.421 101.387,54.269 105.757,49.899 v1(105.757,48.752)
FMC_CAM1_RSVD5: CON1.H7 U400.14 | length 50.9
  Top Layer w0.114: 92.167,57.293 U400.14
  Top Layer w0.254: v1(91.211,56.337) 92.167,57.293 ; CON1.H7 107.163,46.635 107.163,47.6 107.696,48.133 v1(108.382,48.133)
  Mid-Layer 1 w0.254: v1(91.211,56.337) 91.669,56.794 91.669,58.115 92.126,58.572 97.663,58.572 98.781,57.455 104.851,57.455 106.858,55.448 115.621,55.448 117.45,53.619 117.45,50.952 117.043,50.546 115.951,50.546 113.538,48.133 v1(108.382,48.133)
FMC_CAM1_RSVD6: CON1.G7 U400.13 | length 29.6
  Top Layer w0.114: 91.767,58.823 U400.13
  Top Layer w0.254: v1(90.78,57.836) 91.767,58.823 ; CON1.G7 106.646,47.863 106.646,49.419 v1(106.985,49.759)
  Mid-Layer 1 w0.254: v1(90.78,57.836) 90.145,57.201 90.145,55.931 90.627,55.448 93.472,55.448 97.97,50.95 101.577,50.95 104.664,47.863 106.147,47.863 106.985,48.701 v1(106.985,49.759)
FMC_CAM1_VSYNC: CON1.C10 U401.2 | length 32.8
  Top Layer w0.114: U401.2 115.388,68.072 115.617,67.843 115.9,67.843 v1(120.993,62.751)
  Top Layer w0.254: CON1.C10 104.369,54.001 v1(104.369,56.439)
  Bottom Layer w0.254: v1(104.369,56.439) 114.681,56.439 v1(120.993,62.751)
FMC_CAM2_D0: CON1.H26 U402.23 | length 58.4
  Top Layer w0.114: 105.054,81.788 106.887,81.788 106.988,81.89 U402.23
  Top Layer w0.254: CON1.H26 v1(83.49,44.831) ; v1(104.546,82.296) 105.054,81.788
  Mid-Layer 1 w0.254: v1(87.452,74.219) 95.529,82.296 v1(104.546,82.296)
  Mid-Layer 2 w0.254: v1(83.49,44.831) 85.776,44.831 87.655,46.711 87.655,52.121 87.605,52.172 87.605,54.661 87.859,54.915 87.859,73.812 v1(87.452,74.219)
FMC_CAM2_D1: CON1.H25 U402.22 | length 68.8
  Top Layer w0.114: 101.93,81.407 106.957,81.407 107.388,81.839 U402.22
  Top Layer w0.254: CON1.H25 85.319,44.272 v1(88.29,44.272) ; v1(100.559,86.436) 100.559,82.779 101.93,81.407
  Mid-Layer 1 w0.254: v1(86.97,77.241) 96.164,86.436 v1(100.559,86.436)
  Mid-Layer 2 w0.254: v1(86.97,77.241) 88.367,75.844 88.367,54.331 87.986,53.95 87.986,52.756 88.113,52.629 88.113,44.45 v1(88.29,44.272)
FMC_CAM2_D2: CON1.G25 U402.20 | length 58.3
  Top Layer w0.114: 106.828,80.326 108.188,81.686 U402.20
  Top Layer w0.254: v1(80.493,69.748) 80.493,50.368 CON1.G25 ; v1(96.063,72.746) 96.063,73.99 102.398,80.326 106.828,80.326
  Bottom Layer w0.254: v1(80.493,69.748) 82.398,71.653 94.971,71.653 v1(96.063,72.746)
FMC_CAM2_D3: CON1.G24 U402.19 | length 51.9
  Top Layer w0.114: 106.242,79.239 108.588,81.585 U402.19
  Top Layer w0.254: v1(83.033,61.341) 81.785,60.094 81.785,50.346 CON1.G24 ; v1(98.069,74.574) 102.734,79.239 106.242,79.239
  Mid-Layer 1 w0.254: v1(91.643,69.952) 94.869,69.952 98.069,73.152 v1(98.069,74.574)
  Bottom Layer w0.254: v1(83.033,61.341) v1(91.643,69.952)
FMC_CAM2_D4: CON1.H23 U402.17 | length 58.3
  Top Layer w0.114: v1(109.234,81.051) 109.388,81.206 U402.17
  Top Layer w0.254: v1(84.684,48.92) 85.496,48.92 86.766,47.65 86.766,46.559 CON1.H23
  Mid-Layer 1 w0.254: v1(84.684,73) 94.996,73 97.46,75.463 103.646,75.463 v1(109.234,81.051)
  Mid-Layer 2 w0.254: v1(84.684,48.92) v1(84.684,73)
FMC_CAM2_D5: CON1.H22 U402.16 | length 61.4
  Top Layer w0.114: U402.16 109.788,81.788 110.153,81.423 110.153,80.334
  Top Layer w0.254: v1(86.766,48.946) 88.036,47.676 88.036,46.559 CON1.H22 ; v1(109.474,79.654) 110.153,80.334
  Mid-Layer 2 w0.254: v1(86.766,48.946) 86.766,61.773 86.055,62.484 86.055,78.943 v1(86.766,79.654)
  Bottom Layer w0.254: v1(86.766,79.654) v1(109.474,79.654)
FMC_CAM2_D6: CON1.G22 U402.14
FMC_CAM2_D7: CON1.G21 U402.13
FMC_CAM2_D8: CON1.H20 U402.12 | length 61.1
  Top Layer w0.114: 110.287,80.95 110.947,81.61 111.15,81.61 111.388,81.848 U402.12
  Top Layer w0.254: CON1.H20 89.283,46.658 89.283,47.549 88.623,48.209 87.884,48.209 87.503,48.59 87.503,49.86 86.919,50.444 83.337,50.444 83.055,50.727 83.055,52.629 83.871,53.444 83.871,60.706 84.582,61.417 84.582,65.354 90.576,71.349 97.18,71.349 99.746,73.914 100.609,73.914 103.734,77.038 103.734,78.003 104.588,78.858 106.68,78.858 107.985,80.162 110.287,80.162 110.287,80.95
FMC_CAM2_D9: CON1.H19 U402.11 | length 54.2
  Top Layer w0.114: v1@111.176,81.128 111.788,81.74 U402.11
  Top Layer w0.254: v1(90.627,48.438) 90.627,46.584 CON1.H19 ; v1(111.176,80.518) v1@111.176,81.128
  Mid-Layer 2 w0.254: v1(90.627,48.438) 94.31,52.121 94.31,75.844 96.088,77.622 109.779,77.622 110.693,78.537 110.693,80.518 v1(111.176,80.518)
FMC_CAM2_HREF: CON1.D21 U402.9 | length 60.6
  Top Layer w0.114: U402.9 112.588,83.972 112.781,84.165 116.157,84.165
  Top Layer w0.254: CON1.D21 88.709,50.534 v1(89.535,49.708) ; v1(92.532,68.504) 98.12,68.504 100.863,71.247 100.863,73.025 106.248,78.41 107.054,78.41 107.181,78.537 112.968,78.537 113.882,79.45 115.952,79.45 116.157,79.654 116.157,84.165
  Mid-Layer 2 w0.254: v1(89.535,49.708) 90.221,50.394 90.221,54.232 91.358,55.369 91.846,55.369 92.1,55.623 92.1,68.072 v1(92.532,68.504)
FMC_CAM2_PCLK: CON1.G2 U402.6 | length 58.1
  Top Layer w0.114: U402.6 113.788,84.099 113.839,84.15 115.976,84.15
  Top Layer w0.254: v1(104.115,69.875) 104.115,77.622 104.969,78.477 110.159,78.477 110.202,78.519 113.218,78.519 114.149,79.45 116.157,79.45 116.157,83.97 115.976,84.15 ; CON1.G2 114.783,49.175 v1(114.783,60.02)
  Mid-Layer 1 w0.254: v1(104.115,69.875) 104.115,68.314 106.941,65.487 109.315,65.487 v1(114.783,60.02)
FMC_CAM2_PWDN: CON1.C18 U400.12 | length 22.7
  Top Layer w0.114: U400.12 v1@91.367,62.43
  Top Layer w0.254: v1(91.186,62.611) v1@91.367,62.43 ; CON1.C18 v1(92.519,54.559)
  Mid-Layer 1 w0.254: v1(91.186,62.611) 90.78,62.611 84.76,56.591 84.76,55.143 85.344,54.559 v1(92.519,54.559)
FMC_CAM2_RST: CON1.G15 U400.11 | length 20.6
  Top Layer w0.114: 89.383,57.709 90.967,59.293 U400.11
  Top Layer w0.254: 89.383,57.709 89.383,56.388 90.322,55.448 93.472,55.448 93.777,55.143 93.777,53.67 93.116,53.01 93.116,48.717 93.624,48.209 95.91,48.209 96.329,47.79 CON1.G15
FMC_CAM2_RSVD0: CON1.G19 U402.5
FMC_CAM2_RSVD1: CON1.G18 U402.3 | length 69.8
  Top Layer w0.114: 114.262,80.975 114.988,81.701 U402.3
  Top Layer w0.254: v1(91.872,41.808) 91.872,46.584 CON1.G18 ; v1(113.081,80.975) 114.262,80.975
  Mid-Layer 2 w0.254: v1(91.872,41.808) 91.872,45.288 88.494,48.666 88.494,49.987 89.306,50.8 89.306,72.187 95.225,78.105 103.353,78.105 107.743,82.496 111.56,82.496 v1(113.081,80.975)
FMC_CAM2_RSVD2: CON1.H17 U402.2 | length 52.5
  Top Layer w0.114: 113.28,79.553 115.388,81.661 U402.2
  Top Layer w0.254: CON1.H17 93.789,45.073 v1(93.929,44.933) ; v1(112.37,79.553) 113.28,79.553
  Mid-Layer 1 w0.254: v1(99.974,72.644) 102.819,72.644 108.909,78.733 111.55,78.733 v1(112.37,79.553)
  Mid-Layer 2 w0.254: v1(93.929,44.933) 96.317,47.32 96.317,49.936 95.225,51.029 95.225,67.894 v1(99.974,72.644)
FMC_CAM2_RSVD3: CON1.H16 U401.23 | length 38.4
  Top Layer w0.114: v1(106.959,67.386) 106.988,67.415 U401.23
  Top Layer w0.254: CON1.H16 v1(96.165,44.856)
  Mid-Layer 1 w0.254: v1(99.035,63.754) 103.226,67.945 103.226,70.358 103.632,70.764 105.105,70.764 106.959,68.91 v1(106.959,67.386)
  Mid-Layer 2 w0.254: v1(96.165,44.856) 96.774,45.466 96.774,50.444 97.155,50.825 97.155,54.661 96.469,55.347 96.469,58.75 99.035,61.316 v1(99.035,63.754)
FMC_CAM2_RSVD4: CON1.D18 U401.22 | length 42.4
  Top Layer w0.114: v1(107.01,70.637) 107.388,70.259 U401.22
  Top Layer w0.254: v1(85.649,56.134) 87.097,54.686 91.071,54.686 91.999,53.759 91.999,52.705 91.923,52.629 91.923,51.638 CON1.D18
  Mid-Layer 1 w0.254: v1(85.649,56.134) 86.436,56.134 92.075,61.773 92.075,65.405 98.247,71.577 106.07,71.577 v1(107.01,70.637)
FMC_CAM2_RSVD5: CON1.D17 U401.20 | length 41.2
  Top Layer w0.114: U401.20 v1@108.188,72.253
  Top Layer w0.254: CON1.D17 94.844,49.987 v1(94.844,49.251) ; v1(107.747,72.695) v1@108.188,72.253
  Mid-Layer 2 w0.254: v1(94.844,49.251) 94.844,69.291 99.085,73.533 106.909,73.533 v1(107.747,72.695)
FMC_CAM2_RSVD6: CON1.C19 U401.19 | length 33.8
  Top Layer w0.114: v1@108.588,67.116 U401.19
  Top Layer w0.254: v1(91.11,53.34) 91.11,52.451 CON1.C19 ; v1@108.588,67.116 v1(108.921,66.783)
  Mid-Layer 2 w0.254: v1(91.11,53.34) 93.447,53.34 93.878,53.772 93.878,62.572 93.281,63.17 v1(93.193,63.17)
  Bottom Layer w0.254: v1(93.193,63.17) 96.622,66.599 98.298,66.599 98.933,65.964 108.102,65.964 v1(108.921,66.783)
FMC_CAM2_VSYNC: CON1.D20 U402.8 | length 57.8
  Top Layer w0.114: U402.8 112.988,81.677 v1(113.462,81.204)
  Top Layer w0.254: v1(88.875,53.391) 89.383,52.883 89.383,51.638 CON1.D20
  Mid-Layer 2 w0.254: v1(88.875,53.391) 88.875,79.019 93.548,83.693 110.973,83.693 v1(113.462,81.204)
FMC_DVO_D0: CON1.G31
FMC_DVO_D1: CON1.G30
FMC_DVO_D2: CON1.H29
FMC_DVO_D3: CON1.H28
FMC_DVO_D4: CON1.G28
FMC_DVO_D5: CON1.G27
FMC_DVO_D6: CON1.D27
FMC_DVO_D7: CON1.D26
FMC_DVO_D8: CON1.C27
FMC_DVO_D9: CON1.C26
FMC_DVO_D10: CON1.D24
FMC_DVO_D11: CON1.D23
FMC_DVO_DE: CON1.G33
FMC_DVO_HSYNC: CON1.H31
FMC_DVO_IDCK+: CON1.C22
FMC_DVO_RST#: CON1.G34
FMC_DVO_VSYNC: CON1.H32
FMC_FRSTN_M2C_L: CON1.H2
FMC_GA0: CON1.C34
FMC_GA1: CON1.D35
FMC_GPIO0: CON1.H35
FMC_GPIO1: CON1.G36
FMC_GPIO2: CON1.G37
FMC_GPIO3: CON1.D9
FMC_HDMI_HOTPLUG: CON1.H34
FMC_SCL: CON1.C30
FMC_SDA: CON1.C31
GND: C101.1 C102.1 C103.1 C104.1 C105.1 C106.1 C107.1 C201.1 C202.1 C203.1 C207.1 C208.1 CON1.C1 CON1.C4 CON1.C5 CON1.C8 CON1.C9 CON1.C12 CON1.C13 CON1.C16 CON1.C17 CON1.C20 CON1.C21 CON1.C24 CON1.C25 CON1.C28 CON1.C29 CON1.C32 CON1.C33 CON1.C36 CON1.C38 CON1.C40 CON1.D2 CON1.D3 CON1.D6 CON1.D7 CON1.D10 CON1.D13 CON1.D16 CON1.D19 CON1.D22 CON1.D25 CON1.D28 CON1.D37 CON1.D39 CON1.G1 CON1.G4 CON1.G5 CON1.G8 CON1.G11 CON1.G14 CON1.G17 CON1.G20 CON1.G23 CON1.G26 CON1.G29 CON1.G32 CON1.G35 CON1.G38 CON1.G40 CON1.H3 CON1.H6 CON1.H9 CON1.H12 CON1.H15 CON1.H18 CON1.H21 CON1.H24 CON1.H27 CON1.H30 CON1.H33 CON1.H36 CON1.H39 REG200.2 U101.3 U200.1 U200.2 U200.8 U200.13 U201.5 U201.12 U400.1 U400.4 U400.10 U400.15 U400.21 U400.28 U400.34 U400.39 U400.45 U401.1 U401.4 U401.10 U401.15 U401.21 U401.28 U401.34 U401.39 U401.45 U402.1 U402.4 U402.10 U402.15 U402.21 U402.28 U402.34 U402.39 U402.45 | length 580.5
  Top Layer w0.114: 65.837,85.382 68.072,85.382 68.288,85.599 ; 66.688,94.094 U200.8 66.688,90.932 68.288,89.332 ; 68.288,53.481 68.288,85.599 ; U200.2 69.088,91.148 68.288,90.348 68.288,89.332 ; 85.09,60.554 U400.1 86.967,61.514 87.376,61.923 88.017,61.923 88.167,61.773 U400.4 88.167,59.706 88.392,59.481 90.424,59.481 90.567,59.624 U400.10 90.567,61.722 90.297,61.992 90.297,62.992 ; U400.45 88.167,65.227 88.37,65.024 90.364,65.024 90.567,65.227 U400.39 90.567,67.113 90.669,67.215 92.456,67.215 92.567,67.104 U400.34 92.567,65.329 92.745,65.151 94.793,65.151 94.967,65.325 ; U400.15 92.567,62.5 ; U400.21 94.967,62.734 94.967,65.325 ; U400.28 94.967,65.325 ; 106.655,72.873 109.94,75.952 110.188,76.2 U402.34 110.188,78.057 110.338,78.207 112.065,78.207 112.188,78.083 U402.39 112.188,76.2 112.518,75.87 114.258,75.87 ; 106.849,80.848 107.788,81.788 U402.21 ; v1(107.62,75.565) 107.788,75.734 U402.28 ; 107.788,60.96 U401.28 ; 107.788,66.243 U401.21 107.848,70.088 107.848,71.145 ; 109.299,65.834 110.188,64.945 ; 110.188,59.306 110.188,60.96 U401.34 110.188,64.214 ; U401.15 110.188,64.945 ; U402.15 110.188,83.718 110.309,83.839 111.995,83.839 112.188,83.646 U402.10 112.188,81.429 v1(111.557,80.797) ; U401.39 112.188,64.211 ; U401.10 112.188,68.131 113.005,67.314 113.005,64.364 ; v1(113.157,75.565) 113.953,75.565 114.258,75.87 ; U401.45 114.588,64.211 114.436,64.364 113.005,64.364 ; U401.4 114.588,69.901 114.69,70.002 115.687,70.002 115.788,69.901 U401.1 ; U402.4 114.588,83.727 114.706,83.845 115.661,83.845 115.788,83.718 U402.1 115.788,81.153 v1@115.265,80.63 ; v1(117.399,78.207) 114.712,78.207 114.588,78.083 U402.45 114.588,76.2 114.258,75.87 ; 68.288,85.599 U200.13 68.288,89.332 ; 110.188,64.214 110.188,64.945 ; 110.188,64.214 110.338,64.364 112.065,64.364 112.188,64.24 112.188,64.211 ; 112.188,64.211 112.341,64.364 113.005,64.364
  Top Layer w0.178: REG200.2 59.334,89.732 60.746,89.732 62.89,87.588 U101.3 64.618,87.588 65.417,86.788 ; U201.5 62.428,94.894 62.784,94.539 66.243,94.539
  Top Layer w0.254: C103.1 C102.1 33.225,83.996 33.731,83.49 35.204,83.49 38.151,86.436 45.11,86.436 45.547,85.999 C101.1 47.492,83.255 48.45,84.213 52.673,84.213 53.167,83.718 ; C107.1 53.167,83.718 ; C203.1 C202.1 53.797,89.351 54.178,89.732 REG200.2 ; 59.334,89.732 60.046,89.021 60.046,86.97 59.379,86.303 C201.1 53.167,83.718 ; U201.5 U201.12 ; 65.417,86.788 65.417,85.802 65.837,85.382 ; 66.243,94.539 66.688,94.094 ; CON1.G38 67.107,47.232 66.446,46.571 ; 68.288,53.481 67.817,53.01 ; CON1.D37 67.792,50.444 66.447,50.444 CON1.D39 65.837,51.042 64.579,52.299 CON1.C40 ; U200.2 U200.1 ; CON1.C36 68.961,53.01 67.817,53.01 ; CON1.C33 CON1.C32 ; CON1.D28 CON1.C28 CON1.C29 77.191,53.67 76.098,53.67 CON1.C32 ; CON1.H27 81.089,45.974 CON1.G26@82.353,47.238 ; CON1.D25 83.794,51.206 83.794,52.147 CON1.C25 CON1.C24 ; 85.09,60.554 84.379,59.842 84.379,54.864 84.899,54.344 CON1.C24 ; C208.1 C207.1 85.679,84.503 C104.1@86.8,83.382 ; CON1.G23 86.157,47.232 CON1.H24@84.893,45.968 ; 88.167,61.773 88.167,65.227 ; CON1.C21 88.353,52.312 ; CON1.G20 89.979,47.672 88.488,49.164 88.488,49.993 CON1.D22 CON1.D22@87.427,51.054 ; 90.297,62.992 90.805,63.5 91.567,63.5 92.567,62.5 ; CON1.H18 CON1.H18@92.761,45.962 ; CON1.C17 CON1.C16 ; C106.1 C105.1 93.807,88.595 ; 94.967,62.734 95.504,63.271 97.663,63.271 101.6,59.334 106.163,59.334 107.788,60.96 108.195,60.554 109.782,60.554 110.188,60.96 ; CON1.H15 CON1.H15@96.323,45.968 ; CON1.D13 CON1.C13 98.539,52.312 97.333,53.518 97.333,54.458 96.825,54.981 ; CON1.C12 100.139,53.429 98.587,54.981 96.825,54.981 ; v1(100.432,44.933) 100.139,45.225 CON1.H12 100.139,45.974 101.397,47.232 CON1.G11 ; CON1.D10 CON1.C9 ; CON1.G8 105.219,46.82 104.361,45.962 CON1.H9 104.547,45.364 ; CON1.C8 CON1.C9 ; 106.655,72.873 106.655,72.339 107.848,71.145 ; 106.849,80.848 100.609,80.848 93.807,87.65 93.807,88.595 ; CON1.H6 107.162,45.364 104.547,45.364 ; 107.788,66.243 108.198,65.834 109.299,65.834 ; CON1.C5 CON1.C4 ; 110.188,59.306 110.299,59.195 CON1.C4 ; CON1.G4 110.299,47.219 CON1.H3@111.563,45.955 ; CON1.G1 113.436,46.559 112.166,46.559 ; CON1.C1 114.097,52.312 112.839,51.054 CON1.D2 CON1.D3 ; 114.588,69.901 114.588,76.2 ; v1(115.265,80.34) v1@115.265,80.63 ; CON1.C40 63.983,51.715 63.983,47.828 CON1.G40 65.43,48.082 65.913,48.082 66.446,47.549 66.446,46.571 ; CON1.C40 64.135,52.756 64.135,57.963 64.618,58.445 66.65,58.445 67.119,57.976 CON1.C38 67.817,53.01 ; 66.446,46.571 CON1.H39 66.447,45.364 69.062,45.364 CON1.H36 ; CON1.H36 CON1.G35 70.917,47.232 69.659,45.974 CON1.H36 ; CON1.H36 70.282,45.339 72.847,45.339 CON1.H33 ; CON1.H33 73.469,45.974 74.727,47.232 CON1.G32 75.336,47.829 75.336,51.715 CON1.C32 ; CON1.H33 74.727,44.704 76.022,44.704 CON1.H30 77.279,45.974 78.537,47.232 CON1.G29 79.146,47.828 81.763,47.828 CON1.G26@82.353,47.238 ; CON1.C32 74.739,68.237 85.573,79.07 85.573,82.906 86.049,83.382 C104.1@86.8,83.382 ; CON1.G26@82.353,47.238 CON1.G26 82.982,46.609 84.252,46.609 CON1.H24@84.893,45.968 ; CON1.H24@84.893,45.968 CON1.H24 86.196,44.665 87.413,44.665 CON1.H21 v1(90.627,44.044) 90.627,41.326 91.034,40.919 92.253,40.919 92.761,41.427 CON1.H18@92.761,45.962 ; CON1.C24 85.522,51.689 86.792,51.689 CON1.D22@87.427,51.054 ; C104.1@86.8,83.382 C104.1 86.819,87.099 87.909,88.189 93.401,88.189 93.807,88.595 ; CON1.D22@87.427,51.054 88.353,52.312 ; 88.353,52.312 87.986,52.68 87.986,54.077 88.189,54.28 89.408,54.28 89.979,53.709 CON1.C20 90.399,51.892 90.399,51.638 90.995,51.042 CON1.D19 91.249,49.772 CON1.G17 ; CON1.H18@92.761,45.962 92.876,45.962 93.789,46.875 CON1.G17 ; CON1.G17 94.363,47.806 95.504,47.806 95.733,47.577 95.733,46.558 CON1.H15@96.323,45.968 ; CON1.C16 95.059,54.671 95.37,54.981 96.825,54.981 ; CON1.C16 CON1.D16 95.323,50.778 95.323,50.038 97.599,47.762 CON1.G14 97.587,47.232 CON1.H15@96.323,45.968 ; CON1.C9 104.623,51.638 104.623,50.47 104.648,50.444 105.892,50.444 CON1.D7 CON1.D6 107.928,50.873 107.928,50.668 109.271,49.325 109.271,47.473 CON1.G5 109.271,46.99 109.271,46.532 109.703,46.1 109.703,45.593 109.931,45.364 110.972,45.364 CON1.H3@111.563,45.955 ; 104.547,45.364 107.645,42.266 109.423,42.266 111.569,44.412 111.569,45.364 CON1.H3@111.563,45.955 ; CON1.C4 110.299,52.299 111.557,51.042 CON1.D3 ; CON1.H3@111.563,45.955 CON1.H3 112.166,46.559 ; CON1.D3 112.166,50.445 112.166,46.559
  Mid-Layer 1 w0.254: v1(90.627,44.044) 90.627,41.173 91.034,40.767 96.266,40.767 v1(100.432,44.933)
  Mid-Layer 2 w0.254: v1(111.557,80.797) 111.557,80.442 111.277,80.162 111.277,77.216 110.592,76.53 108.585,76.53 v1(107.62,75.565) v1(113.157,75.565) ; v1(115.265,80.34) v1(117.399,78.207)
HDMI_SCL: U200.12
HDMI_SDA: U200.11
I2C_SW_RST: CON1.G16 U200.3 | length 78.9
  Top Layer w0.114: v1(68.123,94.082) 68.688,93.516 U200.3
  Top Layer w0.254: v1(86.081,40.208) 93.472,40.208 94.894,41.631 94.894,45.315 94.463,45.747 94.463,46.635 CON1.G16
  Mid-Layer 2 w0.254: v1(68.123,94.082) 68.123,58.166 v1(86.081,40.208)
MUX_SCL: CON1.H38 U200.14 | length 45.1
  Top Layer w0.114: 68.688,84.061 U200.14
  Top Layer w0.254: CON1.H38 67.716,46.559 67.716,47.549 68.555,48.387 71.12,48.387 71.526,48.793 71.526,81.222 68.688,84.061
MUX_SDA: CON1.H37 U200.15 | length 45.6
  Top Layer w0.114: 69.088,84.379 U200.15
  Top Layer w0.254: CON1.H37 69.037,46.61 69.037,47.755 69.088,47.806 71.933,47.806 72.796,48.669 72.796,80.671 69.088,84.379
NetC201_2: C201.2 C202.2 FB200.2 U201.6 U201.9 | length 59.3
  Top Layer w0.15: v1(74.616,87.884) v1(78.502,91.77) FB200.2
  Top Layer w0.178: U201.6 63.078,97.358 64.378,98.658 U201.9 64.378,101.803 v1(65.888,101.803)
  Top Layer w0.254: C201.2 51.767,87.884 v1@51.767,88.161 ; C202.2 v1@51.767,88.161 ; v1(52.045,87.884) v1@51.767,88.161
  Mid-Layer 1 w0.254: v1(52.045,87.884) 52.463,87.466 60.038,87.466 60.456,87.884 v1(74.616,87.884) ; v1(65.888,101.803) 65.888,100.242 74.36,91.77 v1(78.502,91.77)
NetC203_2: C203.2 R211.2 R212.2 | length 43.7
  Top Layer w0.254: R212.2 50.927,96.143 51.767,95.303 ; C203.2 51.767,95.303 ; v1(52.476,100.736) 51.767,100.027 51.767,95.303 ; R211.2 77.419,98.2 v1(77.419,100.736)
  Bottom Layer w0.254: v1(52.476,100.736) v1(77.419,100.736)
NetC207_2: C207.2 REG200.3 | length 42.3
  Top Layer w0.178: 52.502,87.02 54.563,89.082 REG200.3
  Top Layer w0.254: v1(51.156,85.115) 52.019,85.115 52.502,85.598 52.502,87.02 ; v1(82.169,86.995) 82.169,84.938 82.582,84.525 C207.2
  Mid-Layer 1 w0.254: v1(51.156,85.115) 53.035,86.995 v1(82.169,86.995)
NetC209_2: C209.2 U201.7 | length 33.9
  Top Layer w0.178: U201.7 63.728,96.646 64.008,96.926 v1(65.405,96.926)
  Top Layer w0.254: C209.2 v1(42.545,95.572)
  Mid-Layer 1 w0.254: v1(42.545,95.572) 60.663,95.572 62.586,93.65 62.586,93.193 62.992,92.786 64.719,92.786 65.405,93.472 v1(65.405,96.926)
NetC210_2: C210.2 U201.8 | length 19.2
  Top Layer w0.178: U201.8 64.378,95.809 73.344,95.809
  Top Layer w0.254: 73.344,95.809 73.852,96.317 C210.2
NetCON1_D30: CON1.D30 CON1.D31 | length 1.3
  Top Layer w0.254: CON1.D31 CON1.D30
NetFB201_2: FB201.2 U201.3 | length 30.9
  Top Layer w0.15: v1(78.74,96.571) FB201.2
  Top Layer w0.178: 60.782,94.079 61.128,94.424 U201.3
  Top Layer w0.254: v1(60.782,91.846) 60.782,94.079
  Bottom Layer w0.254: v1(60.782,91.846) 62.027,91.846 62.967,92.786 74.955,92.786 v1(78.74,96.571)
NetR211_1: R211.1 U201.4 | length 24
  Top Layer w0.178: v1@61.778,93.071 U201.4
  Top Layer w0.254: v1(61.671,92.964) v1@61.778,93.071 ; v1(71.73,91.669) 74.879,94.818 74.879,98.786 75.59,99.497 R211.1
  Mid-Layer 1 w0.254: v1(61.671,92.964) 62.967,91.669 v1(71.73,91.669)
NetR212_1: R212.1 U201.2 | length 14.1
  Top Layer w0.178: U201.2 60.478,98.303
  Top Layer w0.254: R212.1 55.474,103.307 60.478,98.303
NetR213_2: R213.2 U201.13 | length 11.6
  Top Layer w0.178: U201.13 61.778,102.489 62.874,103.585
  Top Layer w0.254: 62.874,103.585 R213.2
NetR214_2: R214.2 U201.11 | length 14.2
  Top Layer w0.178: U201.11 63.078,102.413 63.484,102.819 69.741,102.819
  Top Layer w0.254: 69.741,102.819 72.586,99.974 72.586,98.6 71.984,97.997 R214.2
NetU101_2: U101.2
NetU201_1: U201.1 Y1.1 | length 14.8
  Top Layer w0.178: v1(58.623,97.739) 59.828,96.534 U201.1
  Mid-Layer 1 w0.254: Y1.1 47.861,97.739 v1(58.623,97.739)
NetU201_16: U201.16 Y1.2 | length 20.1
  Top Layer w0.178: U201.16 59.828,103.748
  Top Layer w0.254: Y1.2 49.81,102.012 49.791,102.032 49.791,104.038 50.045,104.292 59.284,104.292 59.828,103.748
PG_C2M: CON1.D1
REG_1P8V: C208.2 FB201.1 REG200.5 | length 50.5
  Top Layer w0.15: FB201.1 78.74,104.089 83.822,104.089
  Top Layer w0.178: REG200.5 58.048,90.382 v1(58.395,90.729)
  Top Layer w0.254: v1(80.543,90.729) 83.572,87.7 C208.2 84.279,103.632 83.822,104.089
  Mid-Layer 1 w0.254: v1(58.395,90.729) v1(80.543,90.729)
TMDS_PLL_SCL: U200.10 U201.14 | length 24.5
  Top Layer w0.114: U200.10 67.088,90.062
  Top Layer w0.178: U201.14 61.128,103.419
  Top Layer w0.254: 61.128,103.419 v1(62.687,104.978) ; v1(63.475,93.675) 67.088,90.062
  Mid-Layer 1 w0.254: v1(62.687,104.978) 62.687,94.463 v1(63.475,93.675)
TMDS_PLL_SDA: U200.9 U201.15 | length 41.6
  Top Layer w0.114: U200.9 66.688,89.892
  Top Layer w0.178: 55.88,103.911 59.411,100.381 60.275,100.381 60.478,100.584 U201.15
  Top Layer w0.254: 55.88,103.911 50.216,103.911 50.19,103.886 50.19,102.819 50.597,102.413 52.502,102.413 54,100.914 54,96.444 59.487,90.957 65.623,90.957 66.688,89.892
VADJ: C106.2 C107.2 CON1.G39 CON1.H40 FB200.1 U200.16 U400.7 U400.18 U401.7 U401.18 U402.7 U402.18 | length 227.1
  Top Layer w0.114: U200.16 69.488,86.512 78.045,86.512 ; U400.7 89.367,62.849 ; 93.573,64.567 93.573,64.059 93.878,64.059 94.082,63.856 94.082,62.599 93.767,62.285 U400.18 ; 108.788,73.32 108.788,70.549 108.988,70.349 U401.18 ; U402.18 108.988,83.718 ; v1(108.988,85.115) 108.988,83.718 ; 112.166,74.041 113.833,72.374 113.833,70.923 113.388,70.478 U401.7 ; U402.7 113.388,83.741 113.284,83.845 112.359,83.845 112.124,84.081 109.351,84.081 108.988,83.718
  Top Layer w0.15: 78.502,80.248 78.502,84.531 78.502,86.97 FB200.1
  Top Layer w0.254: C107.2 51.767,79.348 ; v1(53.391,77.724) 51.767,79.348 ; CON1.G39 65.837,47.232 64.579,45.974 CON1.H40 51.767,58.774 51.767,79.348 ; v1(75.979,77.724) 78.502,80.248 v1(81.026,77.724) ; 78.045,86.512 78.502,86.97 v1(80.366,85.115) ; 78.502,84.531 79.214,83.82 84.836,83.82 84.938,83.922 84.938,90.043 87.293,92.399 C106.2 ; 89.367,62.849 90.576,64.059 93.573,64.059 ; v1(91.135,64.567) 93.573,64.567 94.082,64.058 94.082,63.856 ; 108.788,73.32 109.509,74.041 112.166,74.041 v1(111.67,74.538)
  Mid-Layer 1 w0.254: v1(53.391,77.724) v1(75.979,77.724) ; v1(81.026,77.724) 81.026,74.676 v1(91.135,64.567)
  Mid-Layer 2 w0.254: v1(80.366,85.115) v1(108.988,85.115)
  Bottom Layer w0.254: v1(91.135,64.567) 91.135,65.1 100.573,74.538 v1(111.67,74.538)
VIDEO_CLK_S6: CON1.G3 R213.1 | length 99.6
  Top Layer w0.254: R213.1 72.359,105.085 72.967,104.477 72.967,97.554 v1(72.288,96.876) ; v1(110.541,49.606) 111.569,48.578 CON1.G3
  Mid-Layer 2 w0.254: v1(105.461,98.044) 114.351,89.154 114.351,71.552 110.261,67.462 110.261,49.886 v1(110.541,49.606)
  Bottom Layer w0.254: v1(72.288,96.876) 73.457,98.044 v1(105.461,98.044)
VIDEO_CLK_V6: CON1.G6 R214.1 | length 89.8
  Top Layer w0.254: v1(70.891,96.876) 70.891,99.065 71.323,99.497 R214.1 ; CON1.G6 108.356,46.635 v1(108.356,43.307)
  Mid-Layer 2 w0.254: v1(70.891,96.876) 79.451,88.316 v1(79.451,49.784)
  Bottom Layer w0.254: v1(79.451,49.784) 82.626,46.609 105.054,46.609 v1(108.356,43.307)
pads on no net: CON1.0 CON1.C2 CON1.C3 CON1.C6 CON1.C7 CON1.D4 CON1.D5 CON1.D29 CON1.D33 CON1.D34 CON1.H1 CON1.H5 U101.1 U201.10 U400.5 U400.6 U400.8 U400.9 U400.26 U400.27 U400.29 U400.30 U400.32 U400.33 U400.35 U400.36 U400.37 U400.38 U400.40 U400.41 U400.43 U400.44 U400.46 U400.47 U401.26 U401.27 U401.29 U401.30 U401.32 U401.33 U401.35 U401.36 U401.37 U401.38 U401.40 U401.41 U401.43 U401.44 U401.46 U401.47 U402.26 U402.27 U402.29 U402.30 U402.32 U402.33 U402.35 U402.36 U402.37 U402.38 U402.40 U402.41 U402.43 U402.44 U402.46 U402.47

## Polygon pours and split planes (outlines as drawn)
no net on Internal Plane 1 (split plane): 177.29,25.91 25.91,25.91 25.91,126.49 177.29,126.49
no net on Internal Plane 2 (split plane): 177.29,25.91 25.91,25.91 25.91,126.49 177.29,126.49

## Keep-outs
Keep-Out Layer:
  lines w0.254: 24.232,126.033 173.33,126.033 173.584,126.287 173.584,27.227 24.486,27.227 24.359,27.1 24.359,126.033

## Text inside footprints (layer, text, board x,y; h text height)
REG200: Top Overlay "TOL" at 55.896,89.732 h1.27; Top Overlay "VAL" at 55.896,89.732 h1.27; Top Overlay "DEV" at 55.896,89.732 h1.27; Top Overlay "PN" at 55.896,89.732 h1.27; Top Overlay "*" at 54.601,91.88 h1.27; Mechanical 1 "RefDes2" at 55.896,89.732 h1.27; Mechanical 1 "*" at 54.601,91.88 h1.27
U101: Top Overlay "TOL" at 62.5,86.938 h1.27 r180; Top Overlay "VAL" at 62.5,86.938 h1.27 r180; Top Overlay "DEV" at 62.5,86.938 h1.27 r180; Top Overlay "PN" at 62.5,86.938 h1.27 r180; Top Overlay "*" at 63.796,84.789 h1.27 r180; Mechanical 1 "RefDes2" at 62.5,86.938 h1.27 r180; Mechanical 1 "*" at 63.796,84.789 h1.27 r180
U200: Top Overlay "TOL" at 68.088,89.351 h1.27 r270; Top Overlay "VAL" at 68.088,89.351 h1.27 r270; Top Overlay "DEV" at 68.088,89.351 h1.27 r270; Top Overlay "PN" at 68.088,89.351 h1.27 r270; Top Overlay "*" at 70.86,92.424 h1.27 r270; Mechanical 1 "RefDes2" at 68.088,89.351 h1.27 r270; Mechanical 1 "*" at 70.86,92.424 h1.27 r270
U201: Top Overlay "*" at 58.329,95.547 h1.27 r90; Top Overlay "PN" at 62.103,98.62 h1.27 r90; Top Overlay "DEV" at 62.103,98.62 h1.27 r90; Top Overlay "VAL" at 62.103,98.62 h1.27 r90; Top Overlay "TOL" at 62.103,98.62 h1.27 r90; Mechanical 1 "*" at 58.329,95.547 h1.27 r90; Mechanical 1 "RefDes2" at 62.103,98.62 h1.27 r90
U400: Top Overlay "TOL" at 91.567,63.373 h1.27 r90; Top Overlay "VAL" at 91.567,63.373 h1.27 r90; Top Overlay "DEV" at 91.567,63.373 h1.27 r90; Top Overlay "PN" at 91.567,63.373 h1.27 r90; Top Overlay "*" at 85.595,60.3 h1.27 r90; Mechanical 1 "RefDes2" at 91.567,63.373 h1.27 r90; Mechanical 1 "*" at 85.595,60.3 h1.27 r90
U401: Top Overlay "TOL" at 111.188,66.155 h1.27 r270; Top Overlay "VAL" at 111.188,66.155 h1.27 r270; Top Overlay "DEV" at 111.188,66.155 h1.27 r270; Top Overlay "PN" at 111.188,66.155 h1.27 r270; Top Overlay "*" at 117.16,69.228 h1.27 r270; Mechanical 1 "RefDes2" at 111.188,66.155 h1.27 r270; Mechanical 1 "*" at 117.16,69.228 h1.27 r270
U402: Top Overlay "TOL" at 111.188,79.998 h1.27 r270; Top Overlay "VAL" at 111.188,79.998 h1.27 r270; Top Overlay "DEV" at 111.188,79.998 h1.27 r270; Top Overlay "PN" at 111.188,79.998 h1.27 r270; Top Overlay "*" at 117.16,83.071 h1.27 r270; Mechanical 1 "RefDes2" at 111.188,79.998 h1.27 r270; Mechanical 1 "*" at 117.16,83.071 h1.27 r270